# EAGLE board aleph-primary121205 (EAGLE 5.11), part 1 of 2
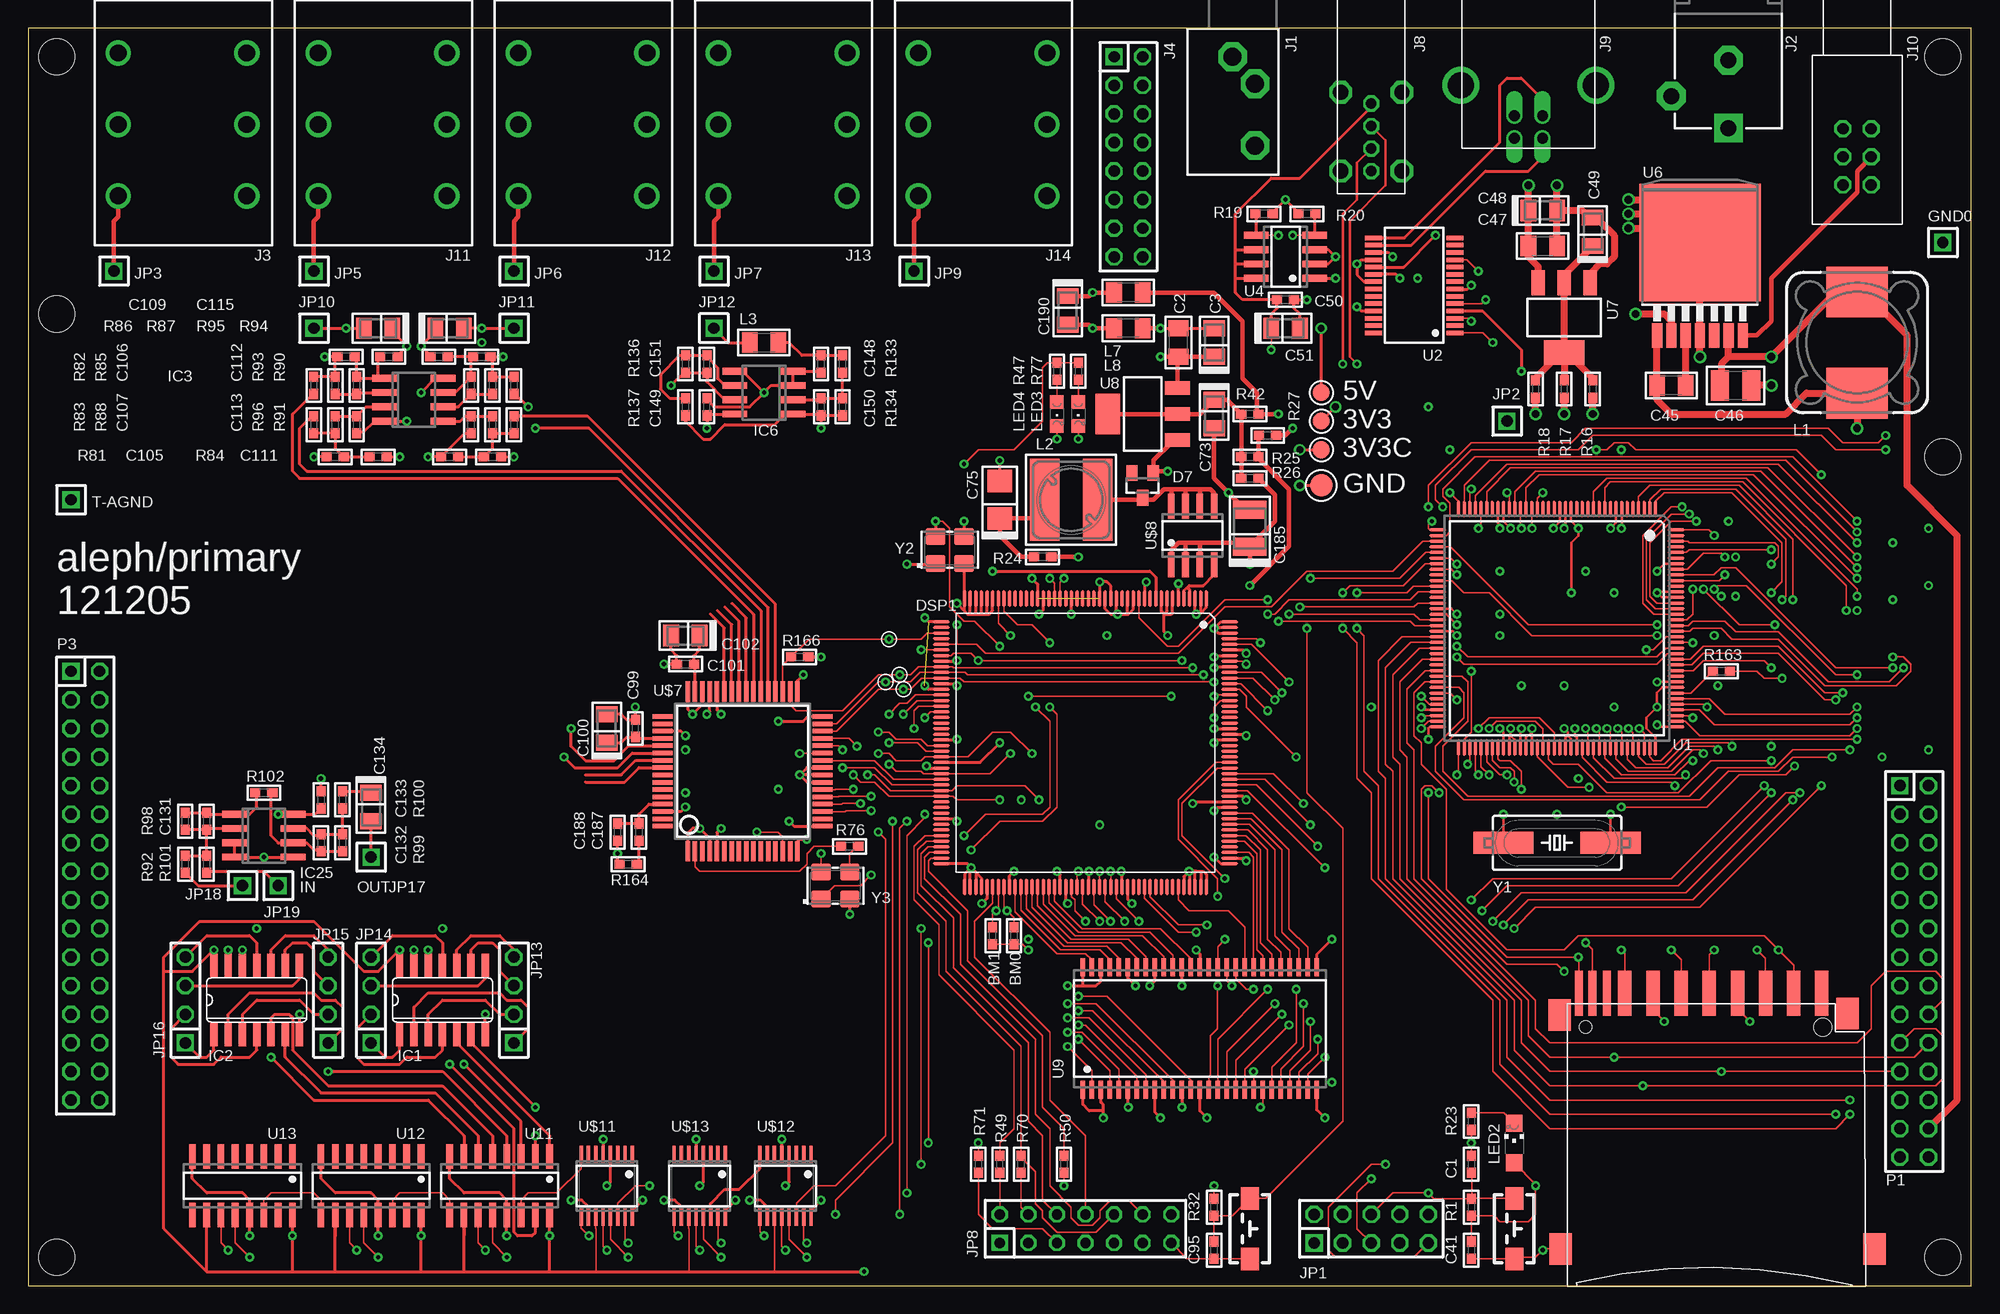
[diagram p0: board, top side]
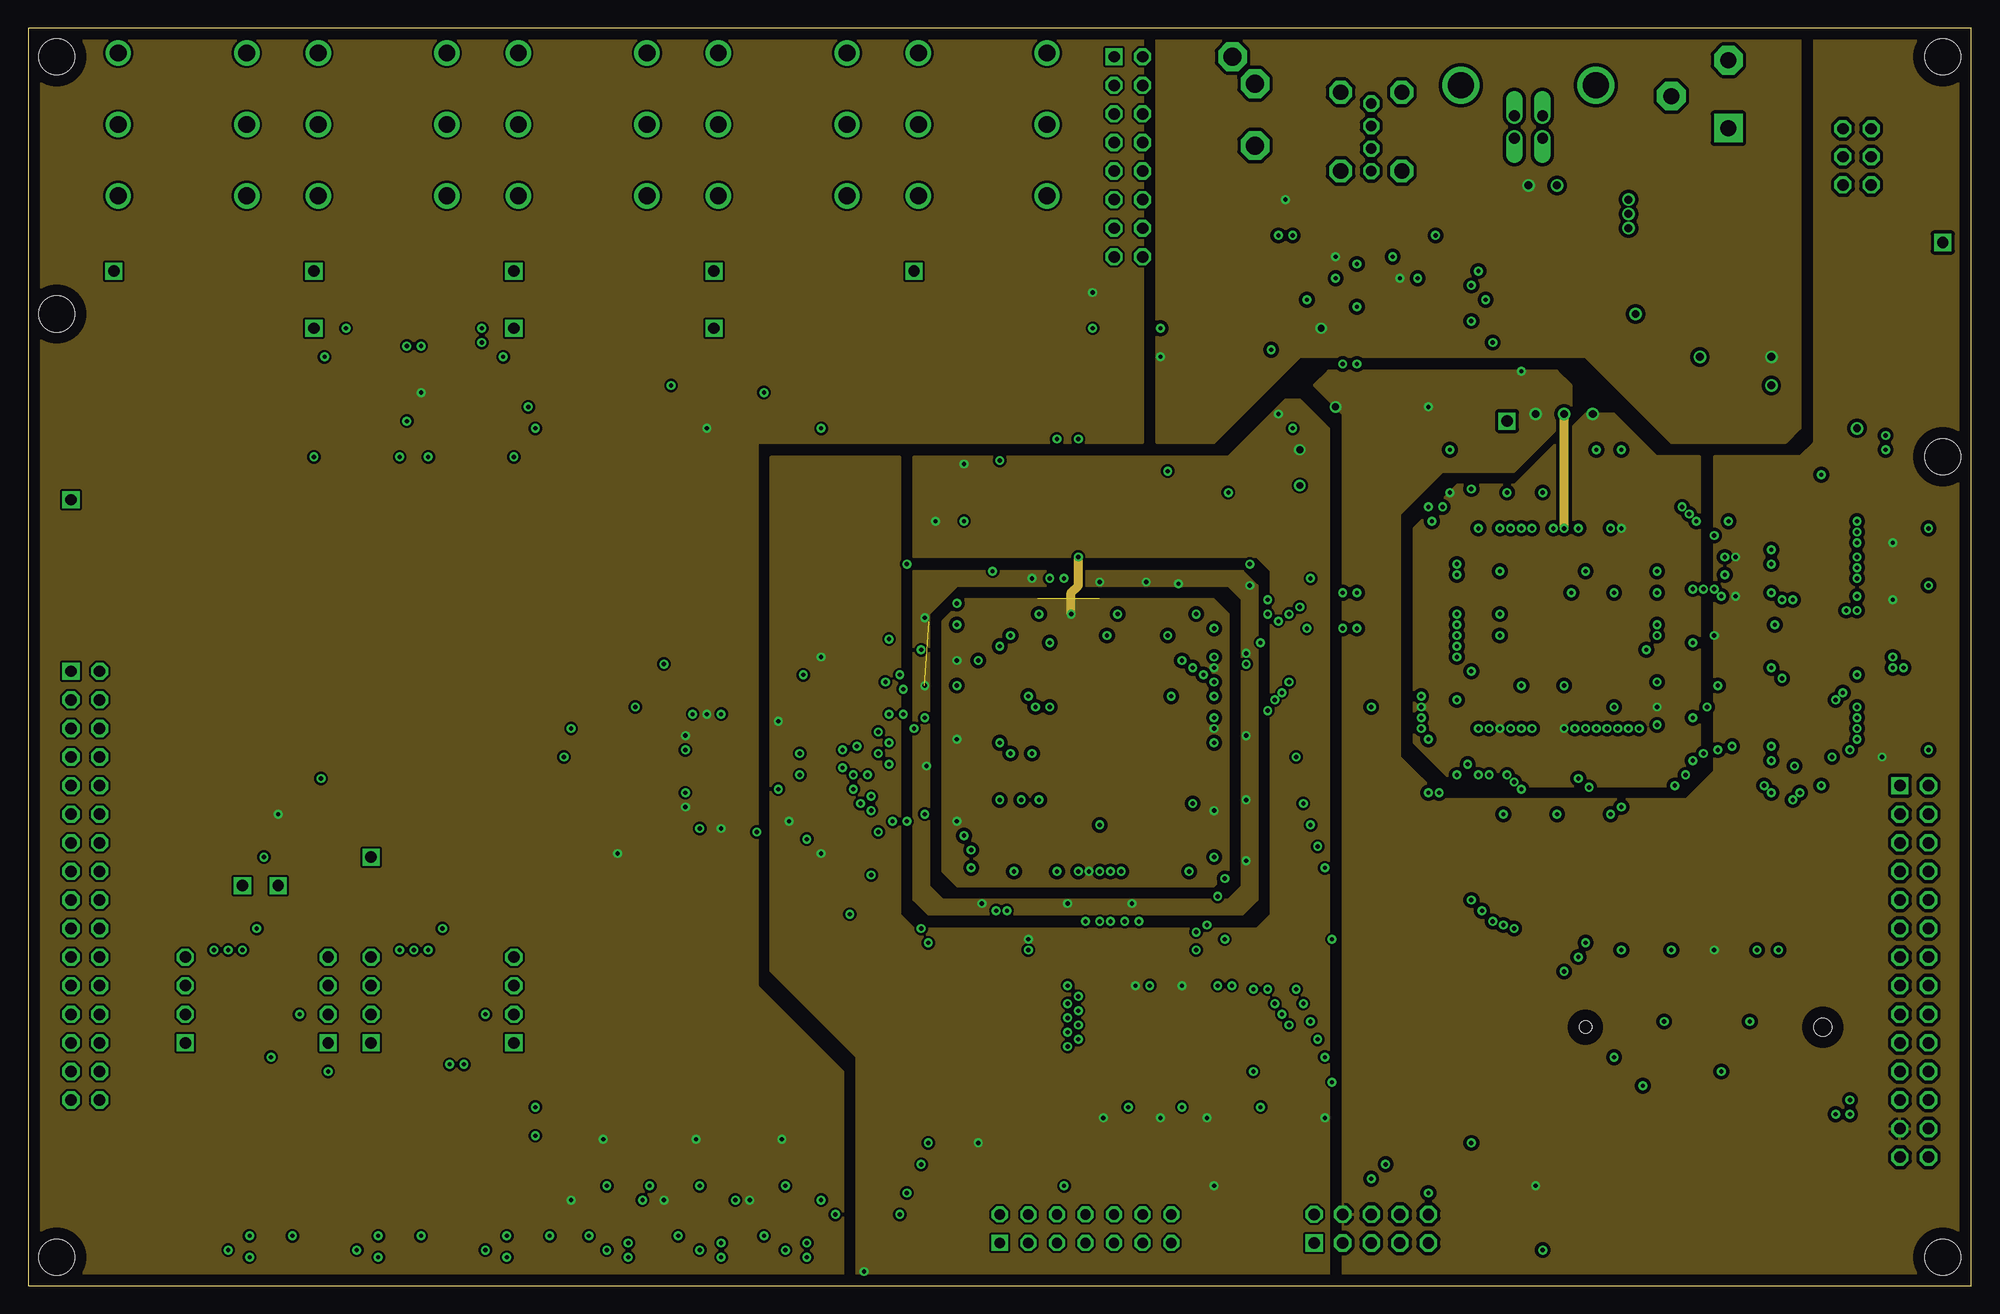
[diagram p1: board, inner layer Route2]
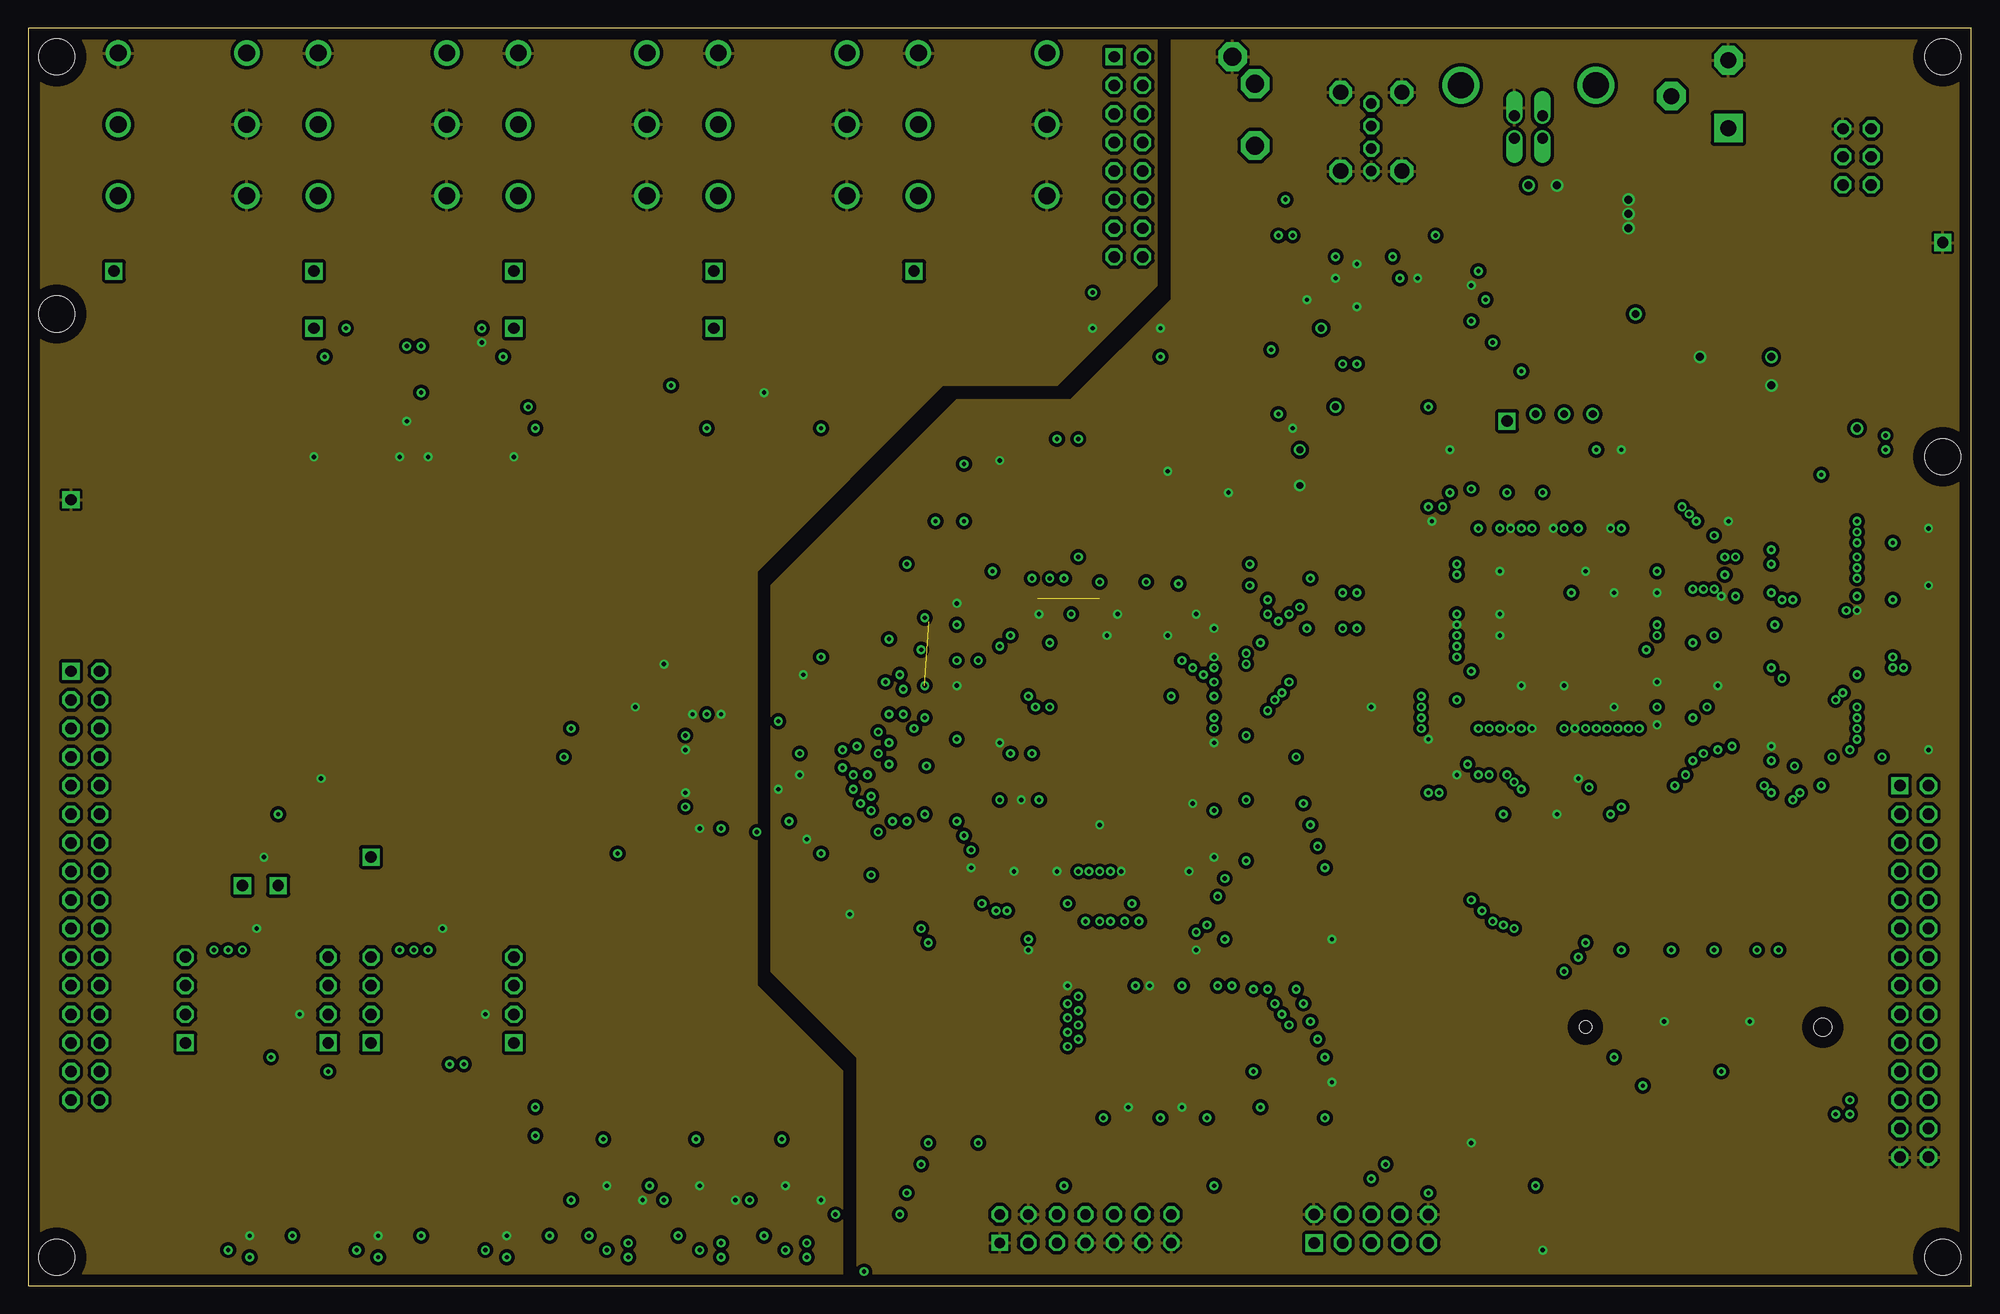
[diagram p2: board, inner layer Route3]
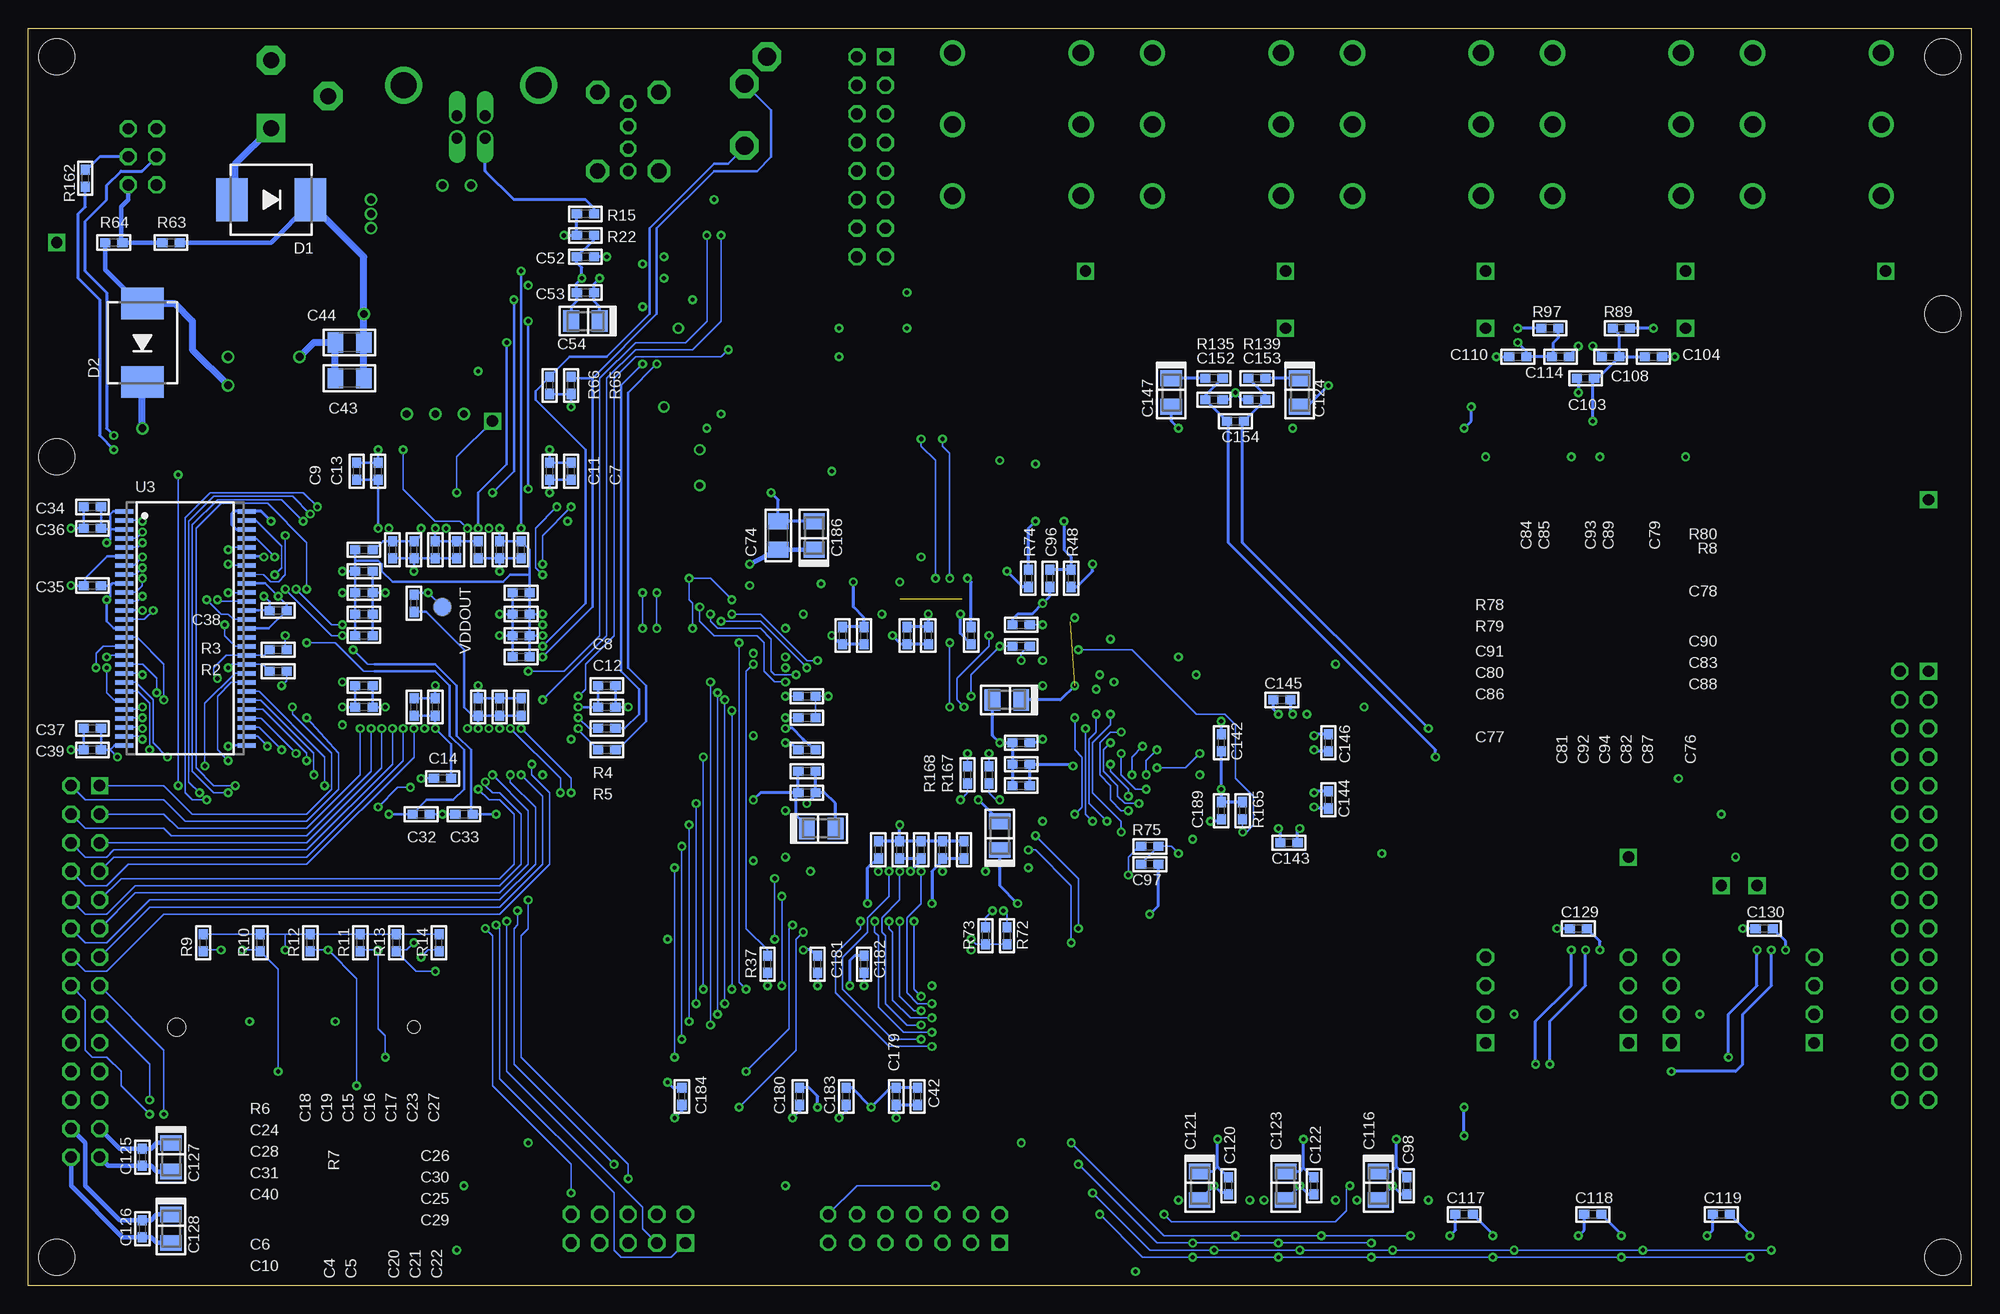
[diagram p3: board, bottom side, seen from below]

Size 172.72 x 111.76 mm. Coordinates in mm from the lower left corner, seen from the top.
Outline: 0,0 172.72,0 172.72,111.76 0,111.76 0,0
Copper layers (1*2+3*16): Top 0.035mm / dielectric 1.5mm / Route2 0.035mm / dielectric 0.15mm / Route3 0.035mm / dielectric 0.2mm / Bottom 0.035mm
Design rules "default *": minimum track width 10mil, minimum drill 24mil, track to track 8mil, track to pad 8mil, pad to pad 8mil, via to via 8mil, smd to smd 8mil, copper to edge 40mil, drill to drill 8mil, minimum pad ring 10mil, minimum via ring 8mil, stop-mask expansion 4mil, vias tented up to drill 0mil, thermal gap 10mil
Holes 3.2 mm at 170.18,109.22 2.54,109.22 2.54,2.54 170.18,2.54 2.54,86.36 170.18,73.66

## Footprints (pad centres in the part's own frame; a part is rotated, then mirrored left to right if it is on the bottom)
SMD-15R = smd 1.5 x 1.5: TP 0,0
R0603 = smd 0.9 x 0.8: 1 -0.762,0; 2 0.762,0
C0603 = smd 0.9 x 0.8: 1 -0.762,0; 2 0.762,0
C1206 = smd 1.4 x 1.8: 1 -1.27,0; 2 1.27,0
C1206/T = smd 1.4 x 1.9: + 1.27,0; - -1.27,0
C3225 = smd 1.6 x 2.7: 1 -1.397,0; 2 1.397,0
C3528/T = smd 2 x 2.2: + 1.651,0; - -1.651,0
C1210/T = smd 1.6 x 3: + 1.651,0; - -1.651,0
SMC = smd 2.8 x 3.8: A 3.493,0; C -3.493,0
SOT23 = smd 1 x 1.4: 1 -0.95,-1.1; 2 0.95,-1.1; 3 0,1.1
LQFP176 = smd 1.5 x 0.25: P$1 -12.8,10.75; P$2 -12.8,10.25; P$3 -12.8,9.75; P$4 -12.8,9.25; P$5 -12.8,8.75; P$6 -12.8,8.25; P$7 -12.8,7.75; P$8 -12.8,7.25; P$9 -12.8,6.75; P$10 -12.8,6.25; P$11 -12.8,5.75; P$12 -12.8,5.25; P$13 -12.8,4.75; P$14 -12.8,4.25; P$15 -12.8,3.75; P$16 -12.8,3.25; P$17 -12.8,2.75; P$18 -12.8,2.25; P$19 -12.8,1.75; P$20 -12.8,1.25; P$21 -12.8,0.75; P$22 -12.8,0.25; P$23 -12.8,-0.25; P$24 -12.8,-0.75; P$25 -12.8,-1.25; P$26 -12.8,-1.75; P$27 -12.8,-2.25; P$28 -12.8,-2.75; P$29 -12.8,-3.25; P$30 -12.8,-3.75; P$31 -12.8,-4.25; P$32 -12.8,-4.75; P$33 -12.8,-5.25; P$34 -12.8,-5.75; P$35 -12.8,-6.25; P$36 -12.8,-6.75; P$37 -12.8,-7.25; P$38 -12.8,-7.75; P$39 -12.8,-8.25; P$40 -12.8,-8.75; P$41 -12.8,-9.25; P$42 -12.8,-9.75; P$43 -12.8,-10.25; P$44 -12.8,-10.75; P$89 12.8,-10.75; P$90 12.8,-10.25; P$91 12.8,-9.75; P$92 12.8,-9.25; P$93 12.8,-8.75; P$94 12.8,-8.25; P$95 12.8,-7.75; P$96 12.8,-7.25; P$97 12.8,-6.75; P$98 12.8,-6.25; P$99 12.8,-5.75; P$100 12.8,-5.25; P$101 12.8,-4.75; P$102 12.8,-4.25; P$103 12.8,-3.75; P$104 12.8,-3.25; P$105 12.8,-2.75; P$106 12.8,-2.25; P$107 12.8,-1.75; P$108 12.8,-1.25; P$109 12.8,-0.75; P$110 12.8,-0.25; P$111 12.8,0.25; P$112 12.8,0.75; P$113 12.8,1.25; P$114 12.8,1.75; P$115 12.8,2.25; P$116 12.8,2.75; P$117 12.8,3.25; P$118 12.8,3.75; P$119 12.8,4.25; P$120 12.8,4.75; P$121 12.8,5.25; P$122 12.8,5.75; P$123 12.8,6.25; P$124 12.8,6.75; P$125 12.8,7.25; P$126 12.8,7.75; P$127 12.8,8.25; P$128 12.8,8.75; P$129 12.8,9.25; P$130 12.8,9.75; P$131 12.8,10.25; P$132 12.8,10.75 | smd 0.25 x 1.5: P$45 -10.75,-12.8; P$46 -10.25,-12.8; P$47 -9.75,-12.8; P$48 -9.25,-12.8; P$49 -8.75,-12.8; P$50 -8.25,-12.8; P$51 -7.75,-12.8; P$52 -7.25,-12.8; P$53 -6.75,-12.8; P$54 -6.25,-12.8; P$55 -5.75,-12.8; P$56 -5.25,-12.8; P$57 -4.75,-12.8; P$58 -4.25,-12.8; P$59 -3.75,-12.8; P$60 -3.25,-12.8; P$61 -2.75,-12.8; P$62 -2.25,-12.8; P$63 -1.75,-12.8; P$64 -1.25,-12.8; P$65 -0.75,-12.8; P$66 -0.25,-12.8; P$67 0.25,-12.8; P$68 0.75,-12.8; P$69 1.25,-12.8; P$70 1.75,-12.8; P$71 2.25,-12.8; P$72 2.75,-12.8; P$73 3.25,-12.8; P$74 3.75,-12.8; P$75 4.25,-12.8; P$76 4.75,-12.8; P$77 5.25,-12.8; P$78 5.75,-12.8; P$79 6.25,-12.8; P$80 6.75,-12.8; P$81 7.25,-12.8; P$82 7.75,-12.8; P$83 8.25,-12.8; P$84 8.75,-12.8; P$85 9.25,-12.8; P$86 9.75,-12.8; P$87 10.25,-12.8; P$88 10.75,-12.8; P$133 10.75,12.8; P$134 10.25,12.8; P$135 9.75,12.8; P$136 9.25,12.8; P$137 8.75,12.8; P$138 8.25,12.8; P$139 7.75,12.8; P$140 7.25,12.8; P$141 6.75,12.8; P$142 6.25,12.8; P$143 5.75,12.8; P$144 5.25,12.8; P$145 4.75,12.8; P$146 4.25,12.8; P$147 3.75,12.8; P$148 3.25,12.8; P$149 2.75,12.8; P$150 2.25,12.8; P$151 1.75,12.8; P$152 1.25,12.8; P$153 0.75,12.8; P$154 0.25,12.8; P$155 -0.25,12.8; P$156 -0.75,12.8; P$157 -1.25,12.8; P$158 -1.75,12.8; P$159 -2.25,12.8; P$160 -2.75,12.8; P$161 -3.25,12.8; P$162 -3.75,12.8; P$163 -4.25,12.8; P$164 -4.75,12.8; P$165 -5.25,12.8; P$166 -5.75,12.8; P$167 -6.25,12.8; P$168 -6.75,12.8; P$169 -7.25,12.8; P$170 -7.75,12.8; P$171 -8.25,12.8; P$172 -8.75,12.8; P$173 -9.25,12.8; P$174 -9.75,12.8; P$175 -10.25,12.8; P$176 -10.75,12.8
SMD-20R = smd 2 x 2: TP 0,0
1X01 = drill 1.016 square: 1 0,0
SO14 = smd 0.66 x 2.032: 1 -3.81,-3.073; 2 -2.54,-3.073; 3 -1.27,-3.073; 4 0,-3.073; 5 1.27,-3.073; 6 2.54,-3.073; 7 3.81,-3.073; 8 3.81,3.073; 9 2.54,3.073; 10 1.27,3.073; 11 0,3.073; 12 -1.27,3.073; 13 -2.54,3.073; 14 -3.81,3.073
SO8 = smd 0.6 x 2.2: 1 -1.905,-2.6; 2 -0.635,-2.6; 3 0.635,-2.6; 4 1.905,-2.6; 5 1.905,2.6; 6 0.635,2.6; 7 -0.635,2.6; 8 -1.905,2.6
SO08 = smd 0.6 x 2.2: 1 -1.905,-2.6; 2 -0.635,-2.6; 3 0.635,-2.6; 4 1.905,-2.6; 5 1.905,2.6; 6 0.635,2.6; 7 -0.635,2.6; 8 -1.905,2.6
SJ1-3533NG = drill 1.6 pad 2.54 octagon: 1 0,-0.9; 2 2.4,1.1; 3 7.9,1.1
PJ-102XH = drill 1.422 pad 2.54 square: 1 0,0 | drill 1.422 pad 2.54 octagon: 2 0,-6.032; 3 5.08,-2.857
NEUTRIK-NRJ6HM-1 = drill 1.5 round: R 7.23,11.1; RN -4.2,11.1; S 7.23,4.75; SN -4.2,4.75; T 7.23,17.45; TN -4.2,17.45
DIL-100-2X08 = drill 1.016 square: 1 -8.89,-1.27 | drill 1.016 octagon: 2 -8.89,1.27; 3 -6.35,-1.27; 4 -6.35,1.27; 5 -3.81,-1.27; 6 -3.81,1.27; 7 -1.27,-1.27; 8 -1.27,1.27; 9 1.27,-1.27; 10 1.27,1.27; 11 3.81,-1.27; 12 3.81,1.27; 13 6.35,-1.27; 14 6.35,1.27; 15 8.89,-1.27; 16 8.89,1.27
USBA-VERT = drill 0.92 octagon: 1 0,-6; 2 0,-4; 3 0,-2; 4 0,0 | drill 1.35 octagon: G1 -2.72,0; G2 -2.72,-7; G3 2.72,-7; G4 2.72,0
USB_B = drill 0.95 offset: DM -1.25,4.71; DP -1.25,2.71; GND 1.25,2.71; VCC 1.25,4.71 | drill 2.3 round: MOUNT1 -6,0; MOUNT2 6,0
PHA2U = drill 1 octagon: 0 -1.25,0; 1 -1.25,-2.5; 2 -1.25,2.5; _0 1.25,0; _1 1.25,-2.5; _2 1.25,2.5
AVR-JTAG-10 = drill 1.016 square: 1 -5.08,-1.27 | drill 1.016 octagon: 2 -5.08,1.27; 3 -2.54,-1.27; 4 -2.54,1.27; 5 0,-1.27; 6 0,1.27; 7 2.54,-1.27; 8 2.54,1.27; 9 5.08,-1.27; 10 5.08,1.27
JPQ-07 = drill 0.914 square: 1 -7.62,-1.27 | drill 0.914 octagon: 2 -7.62,1.27; 3 -5.08,-1.27; 4 -5.08,1.27; 5 -2.54,-1.27; 6 -2.54,1.27; 7 0,-1.27; 8 0,1.27; 9 2.54,-1.27; 10 2.54,1.27; 11 5.08,-1.27; 12 5.08,1.27; 13 7.62,-1.27; 14 7.62,1.27
1X04 = drill 1.016 square: 1 -3.81,0 | drill 1.016 octagon: 2 -1.27,0; 3 1.27,0; 4 3.81,0
MSS1278 = smd 5.5 x 4.5: 1 0,4.5; 2 0,-4.5
SRR6038 = smd 7.3 x 2.6: 1 0,2.35; 2 0,-2.35
L1206 = smd 1.4 x 1.8: 1 -1.27,0; 2 1.27,0
CHIPLED_1206 = smd 1.5 x 1.5: A 0,-1.75; C 0,1.75
CHIPLED_0805 = smd 1.2 x 1.2: A 0,-1.05; C 0,1.05
DIL-100-2X14 = drill 1.016 square: 1 -16.51,-1.27 | drill 1.016 octagon: 2 -16.51,1.27; 3 -13.97,-1.27; 4 -13.97,1.27; 5 -11.43,-1.27; 6 -11.43,1.27; 7 -8.89,-1.27; 8 -8.89,1.27; 9 -6.35,-1.27; 10 -6.35,1.27; 11 -3.81,-1.27; 12 -3.81,1.27; 13 -1.27,-1.27; 14 -1.27,1.27; 15 1.27,-1.27; 16 1.27,1.27; 17 3.81,-1.27; 18 3.81,1.27; 19 6.35,-1.27; 20 6.35,1.27; 21 8.89,-1.27; 22 8.89,1.27; 23 11.43,-1.27; 24 11.43,1.27; 25 13.97,-1.27; 26 13.97,1.27; 27 16.51,-1.27; 28 16.51,1.27
DIL-100-2X16 = drill 1.016 square: 1 -19.05,-1.27 | drill 1.016 octagon: 2 -19.05,1.27; 3 -16.51,-1.27; 4 -16.51,1.27; 5 -13.97,-1.27; 6 -13.97,1.27; 7 -11.43,-1.27; 8 -11.43,1.27; 9 -8.89,-1.27; 10 -8.89,1.27; 11 -6.35,-1.27; 12 -6.35,1.27; 13 -3.81,-1.27; 14 -3.81,1.27; 15 -1.27,-1.27; 16 -1.27,1.27; 17 1.27,-1.27; 18 1.27,1.27; 19 3.81,-1.27; 20 3.81,1.27; 21 6.35,-1.27; 22 6.35,1.27; 23 8.89,-1.27; 24 8.89,1.27; 25 11.43,-1.27; 26 11.43,1.27; 27 13.97,-1.27; 28 13.97,1.27; 29 16.51,-1.27; 30 16.51,1.27; 31 19.05,-1.27; 32 19.05,1.27
LQFP144 = smd 0.25 x 1.5: 1 -8.75,-10.6; 2 -8.25,-10.6; 3 -7.75,-10.6; 4 -7.25,-10.6; 5 -6.75,-10.6; 6 -6.25,-10.6; 7 -5.75,-10.6; 8 -5.25,-10.6; 9 -4.75,-10.6; 10 -4.25,-10.6; 11 -3.75,-10.6; 12 -3.25,-10.6; 13 -2.75,-10.6; 14 -2.25,-10.6; 15 -1.75,-10.6; 16 -1.25,-10.6; 17 -0.75,-10.6; 18 -0.25,-10.6; 19 0.25,-10.6; 20 0.75,-10.6; 21 1.25,-10.6; 22 1.75,-10.6; 23 2.25,-10.6; 24 2.75,-10.6; 25 3.25,-10.6; 26 3.75,-10.6; 27 4.25,-10.6; 28 4.75,-10.6; 29 5.25,-10.6; 30 5.75,-10.6; 31 6.25,-10.6; 32 6.75,-10.6; 33 7.25,-10.6; 34 7.75,-10.6; 35 8.25,-10.6; 36 8.75,-10.6; 73 8.75,10.6; 74 8.25,10.6; 75 7.75,10.6; 76 7.25,10.6; 77 6.75,10.6; 78 6.25,10.6; 79 5.75,10.6; 80 5.25,10.6; 81 4.75,10.6; 82 4.25,10.6; 83 3.75,10.6; 84 3.25,10.6; 85 2.75,10.6; 86 2.25,10.6; 87 1.75,10.6; 88 1.25,10.6; 89 0.75,10.6; 90 0.25,10.6; 91 -0.25,10.6; 92 -0.75,10.6; 93 -1.25,10.6; 94 -1.75,10.6; 95 -2.25,10.6; 96 -2.75,10.6; 97 -3.25,10.6; 98 -3.75,10.6; 99 -4.25,10.6; 100 -4.75,10.6; 101 -5.25,10.6; 102 -5.75,10.6; 103 -6.25,10.6; 104 -6.75,10.6; 105 -7.25,10.6; 106 -7.75,10.6; 107 -8.25,10.6; 108 -8.75,10.6 | smd 1.5 x 0.25: 37 10.6,-8.75; 38 10.6,-8.25; 39 10.6,-7.75; 40 10.6,-7.25; 41 10.6,-6.75; 42 10.6,-6.25; 43 10.6,-5.75; 44 10.6,-5.25; 45 10.6,-4.75; 46 10.6,-4.25; 47 10.6,-3.75; 48 10.6,-3.25; 49 10.6,-2.75; 50 10.6,-2.25; 51 10.6,-1.75; 52 10.6,-1.25; 53 10.6,-0.75; 54 10.6,-0.25; 55 10.6,0.25; 56 10.6,0.75; 57 10.6,1.25; 58 10.6,1.75; 59 10.6,2.25; 60 10.6,2.75; 61 10.6,3.25; 62 10.6,3.75; 63 10.6,4.25; 64 10.6,4.75; 65 10.6,5.25; 66 10.6,5.75; 67 10.6,6.25; 68 10.6,6.75; 69 10.6,7.25; 70 10.6,7.75; 71 10.6,8.25; 72 10.6,8.75; 109 -10.6,8.75; 110 -10.6,8.25; 111 -10.6,7.75; 112 -10.6,7.25; 113 -10.6,6.75; 114 -10.6,6.25; 115 -10.6,5.75; 116 -10.6,5.25; 117 -10.6,4.75; 118 -10.6,4.25; 119 -10.6,3.75; 120 -10.6,3.25; 121 -10.6,2.75; 122 -10.6,2.25; 123 -10.6,1.75; 124 -10.6,1.25; 125 -10.6,0.75; 126 -10.6,0.25; 127 -10.6,-0.25; 128 -10.6,-0.75; 129 -10.6,-1.25; 130 -10.6,-1.75; 131 -10.6,-2.25; 132 -10.6,-2.75; 133 -10.6,-3.25; 134 -10.6,-3.75; 135 -10.6,-4.25; 136 -10.6,-4.75; 137 -10.6,-5.25; 138 -10.6,-5.75; 139 -10.6,-6.25; 140 -10.6,-6.75; 141 -10.6,-7.25; 142 -10.6,-7.75; 143 -10.6,-8.25; 144 -10.6,-8.75
SSOP28 = smd 0.4 x 1.5: 1 -4.225,-3.625; 2 -3.575,-3.625; 3 -2.925,-3.625; 4 -2.275,-3.625; 5 -1.625,-3.625; 6 -0.975,-3.625; 7 -0.325,-3.625; 8 0.325,-3.625; 9 0.975,-3.625; 10 1.625,-3.625; 11 2.275,-3.625; 12 2.925,-3.625; 13 3.575,-3.625; 14 4.225,-3.625; 15 4.225,3.625; 16 3.575,3.625; 17 2.925,3.625; 18 2.275,3.625; 19 1.625,3.625; 20 0.975,3.625; 21 0.325,3.625; 22 -0.325,3.625; 23 -0.975,3.625; 24 -1.625,3.625; 25 -2.275,3.625; 26 -2.925,3.625; 27 -3.575,3.625; 28 -4.225,3.625
TSOP54 = smd 0.4 x 1.6: 1 -10.4,-5.45; 2 -9.6,-5.45; 3 -8.8,-5.45; 4 -8,-5.45; 5 -7.2,-5.45; 6 -6.4,-5.45; 7 -5.6,-5.45; 8 -4.8,-5.45; 9 -4,-5.45; 10 -3.2,-5.45; 11 -2.4,-5.45; 12 -1.6,-5.45; 13 -0.8,-5.45; 14 0,-5.45; 15 0.8,-5.45; 16 1.6,-5.45; 17 2.4,-5.45; 18 3.2,-5.45; 19 4,-5.45; 20 4.8,-5.45; 21 5.6,-5.45; 22 6.4,-5.45; 23 7.2,-5.45; 24 8,-5.45; 25 8.8,-5.45; 26 9.6,-5.45; 27 10.4,-5.45; 28 10.4,5.45; 29 9.6,5.45; 30 8.8,5.45; 31 8,5.45; 32 7.2,5.45; 33 6.4,5.45; 34 5.6,5.45; 35 4.8,5.45; 36 4,5.45; 37 3.2,5.45; 38 2.4,5.45; 39 1.6,5.45; 40 0.8,5.45; 41 0,5.45; 42 -0.8,5.45; 43 -1.6,5.45; 44 -2.4,5.45; 45 -3.2,5.45; 46 -4,5.45; 47 -4.8,5.45; 48 -5.6,5.45; 49 -6.4,5.45; 50 -7.2,5.45; 51 -8,5.45; 52 -8.8,5.45; 53 -9.6,5.45; 54 -10.4,5.45
TO263-7 = smd 0.914 x 2.159: 1 -3.81,-5.715; 2 -2.54,-5.715; 3 -1.27,-5.715; 4 0,-5.715; 5 1.27,-5.715; 6 2.54,-5.715; 7 3.81,-5.715 | smd 10.8 x 10.41: 8 0,2.54
SOT223 = smd 1.219 x 2.235: 1 -2.311,-3.099; 2 0,-3.099; 3 2.311,-3.099 | smd 3.6 x 2.2: 4 0,3.099
SO16 = smd 0.6 x 2.2: 1 -4.445,-2.6; 2 -3.175,-2.6; 3 -1.905,-2.6; 4 -0.635,-2.6; 5 0.635,-2.6; 6 1.905,-2.6; 7 3.175,-2.6; 8 4.445,-2.6; 9 4.445,2.6; 10 3.175,2.6; 11 1.905,2.6; 12 0.635,2.6; 13 -0.635,2.6; 14 -1.905,2.6; 15 -3.175,2.6; 16 -4.445,2.6
PANASONIC-EVQ = smd 2 x 1.6: 1 2.7,0; 2 -2.7,0
06132 = smd 1.2 x 4: 1 6.9,0.9; 2 4.4,0.9; 3 1.9,0.9; 4 -0.6,0.9; 5 -3.1,0.9; 6 -5.6,0.9; 7 -8.1,0.9; 9 9.4,0.9 | smd 0.7 x 4: 8 -9.7,0.9; CD -11,0.9; WP -12.2,0.9 | smd 2 x 2.8: GP -13.8,-21.8; GP2 14.1,-21.8; GP3 11.7,-0.9; GP4 -13.9,-1 | hole 1.1: -11.6,-2.1 | hole 1.6: 9.5,-2.1
SQFP-S-12X12-64 = smd 0.4 x 1.8: 1 -4.875,-7.1; 2 -4.225,-7.1; 3 -3.575,-7.1; 4 -2.925,-7.1; 5 -2.275,-7.1; 6 -1.625,-7.1; 7 -0.975,-7.1; 8 -0.325,-7.1; 9 0.325,-7.1; 10 0.975,-7.1; 11 1.625,-7.1; 12 2.275,-7.1; 13 2.925,-7.1; 14 3.575,-7.1; 15 4.225,-7.1; 16 4.875,-7.1; 33 4.875,7.1; 34 4.225,7.1; 35 3.575,7.1; 36 2.925,7.1; 37 2.275,7.1; 38 1.625,7.1; 39 0.975,7.1; 40 0.325,7.1; 41 -0.325,7.1; 42 -0.975,7.1; 43 -1.625,7.1; 44 -2.275,7.1; 45 -2.925,7.1; 46 -3.575,7.1; 47 -4.225,7.1; 48 -4.875,7.1 | smd 1.8 x 0.4: 17 7.1,-4.875; 18 7.1,-4.225; 19 7.1,-3.575; 20 7.1,-2.925; 21 7.1,-2.275; 22 7.1,-1.625; 23 7.1,-0.975; 24 7.1,-0.325; 25 7.1,0.325; 26 7.1,0.975; 27 7.1,1.625; 28 7.1,2.275; 29 7.1,2.925; 30 7.1,3.575; 31 7.1,4.225; 32 7.1,4.875; 49 -7.1,4.875; 50 -7.1,4.225; 51 -7.1,3.575; 52 -7.1,2.925; 53 -7.1,2.275; 54 -7.1,1.625; 55 -7.1,0.975; 56 -7.1,0.325; 57 -7.1,-0.325; 58 -7.1,-0.975; 59 -7.1,-1.625; 60 -7.1,-2.275; 61 -7.1,-2.925; 62 -7.1,-3.575; 63 -7.1,-4.225; 64 -7.1,-4.875
TSSOP16 = smd 0.3 x 1.5: 1 -2.275,-2.8; 2 -1.625,-2.8; 3 -0.975,-2.8; 4 -0.325,-2.8; 5 0.325,-2.8; 6 0.975,-2.8; 7 1.625,-2.8; 8 2.275,-2.8; 9 2.275,2.8; 10 1.625,2.8; 11 0.975,2.8; 12 0.325,2.8; 13 -0.325,2.8; 14 -0.975,2.8; 15 -1.625,2.8; 16 -2.275,2.8
SMD-15RN = smd 1.5 x 1.5: TP 0,0
HC49UP = smd 5.334 x 1.93: 1 -4.763,0; 2 4.763,0
ASFL1 = smd 1.7 x 1.5: 1 -1.27,-1.2; 2 1.27,-1.2; 3 1.27,1.2; 4 -1.27,1.2

## Placement (x,y rotation side)
3V3  TPS-SMD-15R  [SMD-15R]  114.94,76.83 0 top
3V3C  TPS-SMD-15R  [SMD-15R]  114.94,74.3 0 top
5V  TPS-SMD-15R  [SMD-15R]  114.94,79.38 0 top
BM0  0  [R0603]  87.63,31.11 90 top
BM1  DNP  [R0603]  85.72,31.11 90 top
C1  100n  [C0603]  128.27,10.79 90 top
C2  100n  [C1206]  102.23,83.82 270 top
C3  10u  [C1206/T]  105.41,83.82 270 top
C4  100n  [C0603]  138.43,51.44 90 bottom
C5  33n  [C0603]  136.53,51.44 90 bottom
C6  100n  [C0603]  142.88,53.34 0 bottom
C7  100n  [C0603]  124.46,72.39 90 bottom
C8  100n  [C0603]  121.28,53.34 0 bottom
C9  100n  [C0603]  143.51,72.39 90 bottom
C10  33n  [C0603]  142.88,51.44 0 bottom
C11  33n  [C0603]  126.36,72.39 90 bottom
C12  33n  [C0603]  121.28,51.44 0 bottom
C13  33n  [C0603]  141.6,72.39 90 bottom
C14  4.7u  [C0603]  135.89,45.09 180 bottom
C15  33n  [C0603]  136.53,65.41 270 bottom
C16  100n  [C0603]  134.62,65.41 270 bottom
C17  4.7u  [C0603]  132.72,65.41 270 bottom
C18  2.2u  [C0603]  140.34,65.41 270 bottom
C19  470p  [C0603]  138.43,65.41 270 bottom
C20  2.7n  [C0603]  132.72,51.44 90 bottom
C21  33n  [C0603]  130.81,51.44 90 bottom
C22  2.2u  [C0603]  128.91,51.44 90 bottom
C23  2.7n  [C0603]  130.81,65.41 270 bottom
C24  2.7n  [C0603]  142.88,63.5 0 bottom
C25  2.7n  [C0603]  128.91,57.78 180 bottom
C26  2.7n  [C0603]  128.91,61.59 180 bottom
C27  33n  [C0603]  128.91,65.41 270 bottom
C28  33n  [C0603]  142.88,61.59 0 bottom
C29  33n  [C0603]  128.91,55.88 180 bottom
C30  33n  [C0603]  128.91,59.69 180 bottom
C31  100n  [C0603]  142.88,59.69 0 bottom
C32  22p  [C0603]  137.79,41.91 0 bottom
C33  22p  [C0603]  133.99,41.91 180 bottom
C34  4.7u  [C0603]  167,69.22 180 bottom
C35  100n  [C0603]  167,62.23 180 bottom
C36  33n  [C0603]  167,67.31 180 bottom
C37  100n  [C0603]  167,49.53 180 bottom
C38  33n  [C0603]  150.5,60.01 0 bottom
C39  4.7u  [C0603]  167,47.62 180 bottom
C40  2.2u  [C0603]  142.88,57.78 0 bottom
C41  100n  [C0603]  128.27,3.17 270 top
C42  10n  [C0603]  93.66,16.83 270 bottom
C43  22u  [C1206]  144.15,80.64 0 bottom
C44  470n  [C1206]  144.15,83.82 0 bottom
C45  10n  [C1206]  146.05,80.01 0 top
C46  47u  [C3225]  151.76,80.01 0 top
C47  100n  [C1206]  134.62,92.39 180 top
C48  10u  [C1206/T]  134.62,95.57 180 top
C49  10u  [C1206/T]  139.06,93.66 270 top
C50  100n  [C0603]  111.76,87.63 180 top
C51  4.7u  [C1206/T]  111.76,85.09 180 top
C52  100n  [C0603]  123.19,91.44 0 bottom
C53  100n  [C0603]  123.19,88.27 0 bottom
C54  4.7u  [C1206/T]  123.19,85.72 0 bottom
C73  10u  [C1206/T]  105.41,77.47 90 top
C74  100n  [C1206]  106.05,66.67 270 bottom
C75  100u  [C3528/T]  86.36,69.85 270 top
C76  10u  [C1206/T]  86.36,40.01 270 bottom
C77  10u  [C1206/T]  102.23,40.64 180 bottom
C78  10u  [C1206/T]  85.72,52.07 0 bottom
C79  100n  [C0603]  88.9,57.78 90 bottom
C80  100n  [C0603]  103.5,45.72 180 bottom
C81  100n  [C0603]  97.16,38.73 270 bottom
C82  100n  [C0603]  91.44,38.73 270 bottom
C83  100n  [C0603]  84.45,46.35 0 bottom
C84  100n  [C0603]  100.33,57.78 90 bottom
C85  10n  [C0603]  98.42,57.78 90 bottom
C86  10n  [C0603]  103.5,43.81 180 bottom
C87  10n  [C0603]  89.53,38.73 270 bottom
C88  10n  [C0603]  84.45,44.45 0 bottom
C89  100n  [C0603]  92.71,57.78 90 bottom
C90  100n  [C0603]  84.45,48.26 0 bottom
C91  100n  [C0603]  103.5,47.62 0 bottom
C92  100n  [C0603]  95.25,38.73 270 bottom
C93  10n  [C0603]  94.61,57.78 90 bottom
C94  10n  [C0603]  93.34,38.73 270 bottom
C95  100n  [C0603]  105.41,3.17 270 top
C96  10n  [C0603]  81.92,62.87 270 bottom
C97  10n  [C0603]  73.03,37.47 0 bottom
C98  100n  [C0603]  50.16,8.89 270 bottom
C99  100n  [C0603]  53.98,49.53 270 top
C100  47u  [C1206/T]  51.44,49.53 270 top
C101  100n  [C0603]  58.42,55.24 0 top
C102  10u  [C1206/T]  58.42,57.78 0 top
C103  100n  [C0603]  34.29,80.64 180 bottom
C104  270p  [C0603]  28.26,82.55 0 bottom
C105  560p  [C0603]  31.11,73.66 0 top
C106  68p  [C0603]  29.21,80.01 90 top
C107  220p  [C0603]  29.21,76.52 90 top
C108  2200p  [C0603]  32.07,82.55 180 bottom
C109  10u  [C1206/T]  31.11,85.09 0 top
C110  270p  [C0603]  40.32,82.55 180 bottom
C111  560p  [C0603]  41.27,73.66 0 top
C112  68p  [C0603]  39.37,80.01 90 top
C113  220p  [C0603]  39.37,76.52 90 top
C114  2200p  [C0603]  36.51,82.55 0 bottom
C115  10u  [C1206/T]  37.47,85.09 180 top
C116  10u  [C1206/T]  52.7,8.89 90 bottom
C117  100n  [C0603]  45.09,6.35 0 bottom
C118  100n  [C0603]  33.66,6.35 0 bottom
C119  100n  [C0603]  22.23,6.35 0 bottom
C120  100n  [C0603]  66.04,8.89 270 bottom
C121  10u  [C1206/T]  68.58,8.89 90 bottom
C122  100n  [C0603]  58.42,8.89 270 bottom
C123  10u  [C1206/T]  60.96,8.89 90 bottom
C124  4.7u  [C1206/T]  59.69,79.38 90 bottom
C125  100n  [C0603]  162.56,11.43 90 bottom
C126  100n  [C0603]  162.56,5.08 90 bottom
C127  10u  [C1206/T]  160.02,11.43 90 bottom
C128  10u  [C1206/T]  160.02,5.08 90 bottom
C129  100n  [C0603]  34.92,31.75 180 bottom
C130  100n  [C0603]  18.41,31.75 180 bottom
C131  27p  [C0603]  15.88,41.27 90 top
C132  47p  [C0603]  26.04,39.37 90 top
C133  100n  [C0603]  26.04,43.18 90 top
C134  10u  [C1206/T]  30.48,42.55 90 top
C142  100n  [C0603]  66.67,48.26 270 bottom
C143  100n  [C0603]  60.64,39.37 0 bottom
C144  100n  [C0603]  57.15,43.18 90 bottom
C145  100n  [C0603]  61.28,52.07 180 bottom
C146  100n  [C0603]  57.15,48.26 270 bottom
C147  4.7u  [C1206/T]  71.12,79.38 90 bottom
C148  100p  [C0603]  70.48,81.92 90 top
C149  100n  [C0603]  60.33,78.11 270 top
C150  120p  [C0603]  70.48,78.11 90 top
C151  120p  [C0603]  60.33,81.92 90 top
C152  1n  [C0603]  67.31,78.74 0 bottom
C153  1n  [C0603]  63.5,78.74 0 bottom
C154  100p  [C0603]  65.41,76.83 0 bottom
C179  10n  [C0603]  95.57,16.83 270 bottom
C180  10n  [C0603]  104.14,16.83 270 bottom
C181  10n  [C0603]  102.55,28.57 270 bottom
C182  10n  [C0603]  98.42,28.57 270 bottom
C183  10n  [C0603]  100.01,16.83 270 bottom
C184  10n  [C0603]  114.62,16.83 270 bottom
C185  100u  [C1210/T]  108.58,67.31 270 top
C186  10u  [C1206/T]  102.87,66.67 270 bottom
C187  5600p  [C0603]  54.29,40.32 90 top
C188  390p  [C0603]  52.39,40.32 90 top
C189  100n  [C0603]  66.67,42.23 90 bottom
C190  10u  [C1206/T]  92.39,86.68 90 top
D1  MBRS360T3  [SMC]  151.13,96.52 180 bottom
D2  MBRS360T3  [SMC]  162.56,83.82 90 bottom
D7  zhcs1000  [SOT23]  99.06,71.12 180 top
DSP1  BF533  [LQFP176]  93.98,48.26 270 top
GND  TPS-SMD-20R  [SMD-20R]  114.94,71.12 0 top
GND0  [1X01]  170.18,92.71 0 top
IC1  4066D  [SO14]  36.83,25.4 0 top
IC2  4066D  [SO14]  20.32,25.4 0 top
IC3  AD8606  [SO8]  34.29,78.74 270 top
IC6  AD8606  [SO8]  65.41,79.38 90 top
IC25  TL072D  [SO08]  20.95,40.01 270 top
J1  SJ1-3533NG  [SJ1-3533NG]  107.95,109.22 270 top
J2  PJ-102AH/BH  [PJ-102XH]  151.13,102.87 180 top
J3  STEREOSW2GND  [NEUTRIK-NRJ6HM-1]  15.24,114.3 180 top
J4  F-2X08-DIL-100  [DIL-100-2X08]  97.79,100.33 270 top
J8  USBA-VERT  [USBA-VERT]  119.38,99.06 180 top
J9  [USB_B]  133.35,106.68 180 top
J10  PHA2U  [PHA2U]  162.56,100.33 180 top
J11  STEREOSW2GND  [NEUTRIK-NRJ6HM-1]  33.02,114.3 180 top
J12  STEREOSW2GND  [NEUTRIK-NRJ6HM-1]  50.8,114.3 180 top
J13  STEREOSW2GND  [NEUTRIK-NRJ6HM-1]  68.58,114.3 180 top
J14  STEREOSW2GND  [NEUTRIK-NRJ6HM-1]  86.36,114.3 180 top
JP1  AVR-JTAG  [AVR-JTAG-10]  119.38,5.08 0 top
JP2  [1X01]  131.44,76.83 0 top
JP3  [1X01]  7.62,90.17 0 top
JP5  [1X01]  25.4,90.17 0 top
JP6  [1X01]  43.18,90.17 0 top
JP7  [1X01]  60.96,90.17 0 top
JP8  JPQ-07-100  [JPQ-07]  93.98,5.08 0 top
JP9  [1X01]  78.74,90.17 0 top
JP10  [1X01]  25.4,85.09 0 top
JP11  [1X01]  43.18,85.09 0 top
JP12  [1X01]  60.96,85.09 270 top
JP13  [1X04]  43.18,25.4 90 top
JP14  [1X04]  30.48,25.4 90 top
JP15  [1X04]  26.67,25.4 90 top
JP16  [1X04]  13.97,25.4 90 top
JP17  [1X01]  30.48,38.1 0 top
JP18  [1X01]  19.05,35.56 0 top
JP19  [1X01]  22.23,35.56 0 top
L1  MSS1278  [MSS1278]  162.56,83.82 180 top
L2  SRR6038-100Y  [SRR6038]  92.71,69.85 270 top
L3  600  [L1206]  65.41,83.82 180 top
L7  600  [L1206]  97.79,88.27 0 top
L8  600  [L1206]  97.79,85.09 0 top
LED2  [CHIPLED_1206]  132.08,12.7 0 top
LED3  [CHIPLED_0805]  93.34,77.47 180 top
LED4  [CHIPLED_0805]  91.44,77.47 180 top
P1  M-2X14-DIL-100  [DIL-100-2X14]  167.64,27.94 270 top
P3  M-2X16-DIL-100  [DIL-100-2X16]  5.08,35.56 270 top
R1  10k  [R0603]  128.27,6.99 270 top
R2  4.7k  [R0603]  150.5,54.61 0 bottom
R3  4.7k  [R0603]  150.5,56.52 0 bottom
R4  39  [R0603]  121.28,49.53 0 bottom
R5  39  [R0603]  121.28,47.62 0 bottom
R6  0  [R0603]  142.88,65.41 180 bottom
R7  0  [R0603]  138.43,60.64 270 bottom
R8  100k  [R0603]  84.45,56.83 180 bottom
R9  100k  [R0603]  157.16,30.48 90 bottom
R10  100k  [R0603]  152.08,30.48 90 bottom
R11  100k  [R0603]  143.19,30.48 90 bottom
R12  100k  [R0603]  147.64,30.48 90 bottom
R13  100k  [R0603]  140.02,30.48 90 bottom
R14  100k  [R0603]  136.21,30.48 90 bottom
R15  4.7k  [R0603]  123.19,95.25 0 bottom
R16  0  [R0603]  139.06,79.69 90 top
R17  0  [R0603]  136.53,79.69 90 top
R18  0  [R0603]  133.99,79.69 90 top
R19  47k  [R0603]  109.86,95.25 0 top
R20  47k  [R0603]  113.67,95.25 180 top
R22  10k  [R0603]  123.19,93.34 0 bottom
R23  150  [R0603]  128.27,14.61 90 top
R24  0  [R0603]  90.17,64.77 180 top
R25  0  [R0603]  108.58,73.66 180 top
R26  0  [R0603]  108.58,71.75 180 top
R27  3.32k  [R0603]  110.17,75.56 0 top
R32  10k  [R0603]  105.41,6.99 90 top
R37  22  [R0603]  107,28.57 90 bottom
R42  0  [R0603]  108.58,77.47 180 top
R47  150  [R0603]  91.44,81.28 90 top
R48  10k  [R0603]  80.01,62.87 90 bottom
R49  0  [R0603]  86.36,10.79 270 top
R50  0  [R0603]  92.08,10.79 270 top
R63  330k  [R0603]  160.02,92.71 0 bottom
R64  100k  [R0603]  165.1,92.71 180 bottom
R65  10k  [R0603]  124.46,80.01 90 bottom
R66  10k  [R0603]  126.36,80.01 90 bottom
R70  4k7  [R0603]  88.27,10.79 270 top
R71  4k7  [R0603]  84.45,10.79 270 top
R72  10k  [R0603]  85.72,31.11 270 bottom
R73  10k  [R0603]  87.63,31.11 270 bottom
R74  33  [R0603]  83.82,62.87 90 bottom
R75  10k  [R0603]  73.03,39.05 0 bottom
R76  33  [R0603]  73.03,39.05 0 top
R77  150  [R0603]  93.34,81.28 90 top
R78  10k  [R0603]  103.5,52.39 0 bottom
R79  10k  [R0603]  103.5,50.48 0 bottom
R80  10k  [R0603]  84.45,58.74 0 bottom
R81  5K62  [R0603]  27.3,73.66 180 top
R82  11k  [R0603]  25.4,80.01 270 top
R83  5K62  [R0603]  25.4,76.52 90 top
R84  5K62  [R0603]  37.47,73.66 180 top
R85  3K01  [R0603]  27.3,80.01 90 top
R86  11k  [R0603]  28.26,82.55 180 top
R87  604  [R0603]  32.07,82.55 0 top
R88  1K5  [R0603]  27.3,76.52 90 top
R89  49k9  [R0603]  31.11,85.09 180 bottom
R90  11k  [R0603]  43.18,80.01 270 top
R91  5K62  [R0603]  43.18,76.52 90 top
R92  10k  [R0603]  13.97,37.47 270 top
R93  3k01  [R0603]  41.27,80.01 90 top
R94  11k  [R0603]  40.32,82.55 0 top
R95  604  [R0603]  36.51,82.55 180 top
R96  1k65  [R0603]  41.27,76.52 90 top
R97  49k9  [R0603]  37.47,85.09 0 bottom
R98  10k  [R0603]  13.97,41.27 270 top
R99  10k  [R0603]  27.94,39.37 270 top
R100  100  [R0603]  27.94,43.18 270 top
R101  10k  [R0603]  15.88,37.47 270 top
R102  10k  [R0603]  20.95,43.81 180 top
R133  5k76  [R0603]  72.39,81.92 90 top
R134  5k76  [R0603]  72.39,78.11 90 top
R135  237  [R0603]  67.31,80.64 180 bottom
R136  5k76  [R0603]  58.42,81.92 90 top
R137  5k76  [R0603]  58.42,78.11 270 top
R139  237  [R0603]  63.5,80.64 0 bottom
R162  100k  [R0603]  167.64,98.42 270 bottom
R163  22  [R0603]  150.5,54.61 180 top
R164  562  [R0603]  53.34,37.47 180 top
R165  10k  [R0603]  64.77,42.23 90 bottom
R166  100k  [R0603]  68.58,55.88 180 top
R167  0  [R0603]  87.31,45.4 90 bottom
R168  0  [R0603]  89.22,45.4 90 bottom
T-AGND  [1X01]  3.81,69.85 0 top
U1  AT32UC3A0512  [LQFP144]  135.89,58.42 180 top
U2  FT232RL  [SSOP28]  123.19,88.9 90 top
U3  MT48LC16M16A2  [TSOP54]  158.75,58.42 270 bottom
U4  TPS2020  [SO08]  111.76,91.44 90 top
U6  LM2678  [TO263-7]  148.59,90.17 0 top
U7  ADP3339  [SOT223]  136.53,86.04 180 top
U8  ADP3339  [SOT223]  99.06,77.47 90 top
U9  MT48LC32M16A2tg-75  [TSOP54]  104.14,22.86 0 top
U11  74LS595D  [SO16]  41.91,8.89 180 top
U12  74LS595D  [SO16]  30.48,8.89 180 top
U13  74LS595D  [SO16]  19.05,8.89 180 top
U$1  PANASONIC-EVQ  [PANASONIC-EVQ]  132.08,5.08 270 top
U$6  SDMMC06132  [06132]  150.02,25.08 0 top
U$7  AD1939  [SQFP-S-12X12-64]  63.5,45.72 0 top
U$8  FDS9431A  [SO08]  103.5,66.67 0 top
U$9  PANASONIC-EVQ  [PANASONIC-EVQ]  108.58,5.08 270 top
U$11  AD5317R  [TSSOP16]  51.44,8.89 180 top
U$12  AD5686R  [TSSOP16]  67.31,8.89 180 top
U$13  AD5317R  [TSSOP16]  59.69,8.89 180 top
VDDOUT  TPS-SMD-15RN  [SMD-15RN]  135.89,60.33 180 bottom
Y1  12mhz  [HC49UP]  135.89,39.37 0 top
Y2  ASFL1-27mhz  [ASFL1]  81.92,65.41 0 top
Y3  ASFL1-12.288mhz  [ASFL1]  71.75,35.56 0 top

## Library data of the parts
3V3 3V3C 5V GND VDDOUT = testpoint
BM0 BM1 C1-C54 C73-C134 C142-C154 C179-C190 L3 L7 L8 R1-R20 R22-R27 R32 R37 R42 R47-R50 R63-R66 R70-R102 R133-R137 R139 R162-R168 = rc-master-smd
D1 D2 D7 = diode
DSP1 J1 J8-J10 U3 U4 U6-U9 U$1 U$6-U$9 U$11-U$13 = monome-inc
GND0 JP2 JP3 JP5-JP7 JP9-JP19 T-AGND = pinhead
IC1 IC2 = 40xx
IC3 IC6 = analog-devices; MPN: AD8607ARMZ-R2; OC_FARNELL: 1651293; OC_NEWARK: 19M8927
IC25 = linear
J2 = con-cuistack
J3 J11-J14 = Audio Jacks 0.25 inch
J4 P1 P3 = con-headers-jp
JP1 U1 = atmel-avr32
JP8 = jumpers
L1 = inductor-coilcraft
L2 = inductor-bourns
LED2-LED4 = led
U2 = ftdi-chip
U11-U13 = 74xx-us
Y1-Y3 = crystal

## Nets
+3V3: 3V3.TP C34.1 C35.1 C36.1 C37.1 C38.1 C39.1 C41.1 C125.2 C127.+ JP1.4 LED2.A P1.25 R1.2 R3.2 R9.2 R10.2 R11.2 R12.2 R13.2 R14.2 R18.1 R65.1 R66.1 U2.4 U3.1 U3.3 U3.9 U3.14 U3.27 U3.43 U3.49 U$6.4
+3V3A: C98.1 C103.2 C116.+ C120.1 C121.+ C122.1 C123.+ C133.1 C143.1 C144.1 C145.1 C146.1 C149.2 C188.1 C190.+ IC3.8 IC6.8 IC25.8 L7.1 R164.2 U$7.5 U$7.45 U$7.51 U$7.62 U$11.5 U$11.10 U$12.5 U$12.10 U$13.5 U$13.10
+3V3C: 3V3C.TP C42.2 C96.1 C97.1 C117.1 C118.1 C119.1 C129.1 C130.1 C142.1 C179.2 C180.2 C181.2 C182.2 C183.2 C184.2 C189.1 IC1.14 IC2.14 L7.2 R8.2 R32.2 R42.1 R47.2 R48.2 R71.1 R72.2 R73.2 R75.2 R77.2 R78.2 R79.2 R166.1 U9.1 U9.3 U9.9 U9.14 U9.27 U9.43 U9.49 U11.10 U11.16 U12.10 U12.16 U13.10 U13.16 U$7.17 U$7.32 U$11.11 U$12.11 U$13.11 Y2.4 Y3.4
+5V: 5V.TP C2.2 C3.+ C46.1 C47.2 C48.+ C53.2 C54.+ C126.2 C128.+ L1.2 P1.26 R19.2 R20.2 U2.20 U4.2 U4.3 U6.6 U7.3 U8.3
A-A2: U1.114 U3.23
A-A3: U1.112 U3.24
A-A4: U1.110 U3.25
A-A5: U1.107 U3.26
A-A6: U1.105 U3.29
A-A7: U1.103 U3.30
A-A8: U1.101 U3.31
A-A9: U1.99 U3.32
A-A10: U1.97 U3.33
A-A11: U1.95 U3.34
A-A13: U1.89 U3.35
A-A14: U1.87 U3.36
A-A16: U1.65 U3.20
A-A17: U1.63 U3.21
A-D0: U1.38 U3.2
A-D1: U1.35 U3.4
A-D2: U1.33 U3.5
A-D3: U1.31 U3.7
A-D4: U1.26 U3.8
A-D5: U1.24 U3.10
A-D6: U1.12 U3.11
A-D7: U1.10 U3.13
A-D8: U1.4 U3.42
A-D9: U1.2 U3.44
A-D10: U1.1 U3.45
A-D11: U1.144 U3.47
A-D12: U1.142 U3.48
A-D13: U1.140 U3.50
A-D14: U1.137 U3.51
A-D15: U1.135 U3.53
A-RESET: C1.1 JP1.6 R1.1 U1.23 U$1.2
A-SDA10: U1.136 U3.22
A-TCK: JP1.1 U1.129
A-TDI: JP1.9 U1.131
A-TDO: JP1.3 U1.130
A-TMS: JP1.5 U1.128
ABE0_: DSP1.P$151 U9.15
ABE1_: DSP1.P$150 U9.39
AD1939_RESET: DSP1.P$50 R165.1 U$7.14
AGND: C98.2 C99.1 C100.- C101.1 C102.- C103.1 C104.1 C105.2 C107.1 C108.1 C110.1 C111.2 C113.1 C114.1 C116.- C117.2 C118.2 C119.2 C120.2 C121.- C122.2 C123.- C129.2 C130.2 C133.2 C143.2 C144.2 C145.2 C146.2 C148.1 C149.1 C152.2 C153.1 C190.- IC1.7 IC2.7 IC3.4 IC6.3 IC6.4 IC6.5 IC25.3 IC25.4 IC25.5 J3.RN J3.S J3.TN J11.RN J11.S J11.TN J12.RN J12.S J12.TN J13.RN J13.S J13.TN J14.RN J14.S J14.TN L8.1 R81.2 R84.2 R89.2 R97.2 T-AGND.1 U11.8 U11.13 U12.8 U12.13 U13.8 U13.13 U$7.1 U$7.4 U$7.44 U$7.46 U$7.48 U$11.4 U$11.16 U$12.4 U$12.16 U$13.4 U$13.16
B-A1: DSP1.P$149 U9.23
B-A2: DSP1.P$148 U9.24
B-A3: DSP1.P$147 U9.25
B-A4: DSP1.P$146 U9.26
B-A5: DSP1.P$142 U9.29
B-A6: DSP1.P$141 U9.30
B-A7: DSP1.P$140 U9.31
B-A8: DSP1.P$139 U9.32
B-A9: DSP1.P$138 U9.33
B-A10: DSP1.P$137 U9.34
B-A12: DSP1.P$135 U9.35
B-A13: DSP1.P$127 U9.36
B-A18: DSP1.P$122 U9.20
B-A19: DSP1.P$121 U9.21
B-D0: DSP1.P$116 U9.2
B-D1: DSP1.P$115 U9.4
B-D2: DSP1.P$114 U9.5
B-D3: DSP1.P$113 U9.7
B-D4: DSP1.P$112 U9.8
B-D5: DSP1.P$110 U9.10
B-D6: DSP1.P$109 U9.11
B-D7: DSP1.P$108 U9.13
B-D8: DSP1.P$105 U9.42
B-D9: DSP1.P$104 U9.44
B-D10: DSP1.P$103 U9.45
B-D11: DSP1.P$102 U9.47
B-D12: DSP1.P$101 U9.48
B-D13: DSP1.P$100 U9.50
B-D14: DSP1.P$99 U9.51
B-D15: DSP1.P$98 U9.53
B-HWAIT: DSP1.P$49 R80.2 U1.39
B-MISO: DSP1.P$54 U1.53 U$7.31
B-MOSI: DSP1.P$55 U1.50 U$7.30
B-RESET: C95.1 DSP1.P$13 R32.1 U1.41 U$9.2
B-SCK: DSP1.P$53 U1.54 U$7.34
B-SPISEL4: DSP1.P$47 R166.2 U$7.35
B-SPISS: DSP1.P$51 R8.1 U1.48
BMODE0: BM0.2 DSP1.P$96 R73.1
BMODE1: BM1.2 DSP1.P$95 R72.1
BYP1: IC1.13 U11.15
BYP2: IC1.5 U11.1
BYP3: IC1.6 U11.2
BYP4: IC1.12 U11.3
CAS: U1.126 U3.17
CLKIN: DSP1.P$10 R74.1
CLKOUT: DSP1.P$169 R37.2
CS1: U1.46 U3.19
DAC-LDAC: DSP1.P$37 U$11.9 U$12.9 U$13.9
DAC-RESET: DSP1.P$38 U$11.15 U$12.15 U$13.15
DM: J8.2 R4.2
DP: J8.3 R5.2
DQM0: U1.120 U3.15
DQM1: U1.40 U3.39
DR0PRI: DSP1.P$74 U$7.27
DR0SEC: DSP1.P$73 U$7.26
DT0PRI: DSP1.P$68 U$7.20
DT0SEC: DSP1.P$67 U$7.19
DT1PRI: DSP1.P$59 U$11.14
DT1SEC: DSP1.P$58 U$12.14
EMU_: DSP1.P$83 R49.1
ENC0A: P1.7 U1.98
ENC0B: P1.8 U1.96
ENC1A: P1.5 U1.102
ENC1B: P1.6 U1.100
ENC2A: P1.3 U1.106
ENC2B: P1.4 U1.104
ENC3A: P1.1 U1.113
ENC3B: P1.2 U1.111
F1CV1: U$12.3
F1CV2: U$12.2
F1CV3: U$12.6
F1CV4: U$12.7
FD1: U13.15
FD2: U13.1
FD3: U13.2
FD4: U13.3
FTDI-CTS: U1.34 U2.3
FTDI-RTS: U1.32 U2.11
FTDI-RX: U1.25 U2.1
FTDI-TX: U1.27 U2.5
GND: BM0.1 BM1.1 C1.2 C2.1 C3.- C4.2 C5.2 C6.2 C7.2 C8.2 C9.2 C10.2 C11.2 C12.2 C13.2 C14.2 C15.2 C16.2 C17.2 C18.2 C19.2 C20.2 C21.2 C22.2 C23.2 C24.2 C25.2 C26.2 C27.2 C28.2 C29.2 C30.2 C31.2 C32.2 C33.2 C34.2 C35.2 C36.2 C37.2 C38.2 C39.2 C40.2 C41.2 C42.1 C43.1 C44.1 C46.2 C47.1 C48.- C49.- C50.1 C51.- C52.1 C53.1 C54.- C73.- C74.1 C75.- C76.- C77.- C78.- C79.1 C80.1 C81.1 C82.1 C83.1 C84.1 C85.1 C86.1 C87.1 C88.1 C89.1 C90.1 C91.1 C92.1 C93.1 C94.1 C95.2 C96.2 C97.2 C125.1 C126.1 C127.- C128.- C142.2 C179.1 C180.1 C181.1 C182.1 C183.1 C184.1 C185.- C186.- C189.2 D2.A D7.1 DSP1.P$1 DSP1.P$2 DSP1.P$3 DSP1.P$7 DSP1.P$8 DSP1.P$9 DSP1.P$14 DSP1.P$15 DSP1.P$17 DSP1.P$19 DSP1.P$30 DSP1.P$39 DSP1.P$40 DSP1.P$41 DSP1.P$42 DSP1.P$43 DSP1.P$44 DSP1.P$56 DSP1.P$70 DSP1.P$88 DSP1.P$89 DSP1.P$90 DSP1.P$91 DSP1.P$92 DSP1.P$97 DSP1.P$106 DSP1.P$117 DSP1.P$128 DSP1.P$129 DSP1.P$130 DSP1.P$131 DSP1.P$132 DSP1.P$133 DSP1.P$144 DSP1.P$155 DSP1.P$170 DSP1.P$174 DSP1.P$175 DSP1.P$176 GND0.1 GND.TP J1.1 J2.2 J8.4 J8.G1 J8.G2 J8.G3 J8.G4 J9.GND J10._1 JP1.2 JP1.10 JP8.1 JP8.4 JP8.7 JP8.9 JP8.11 JP8.13 L8.2 P1.27 P1.28 R2.2 R22.2 R23.1 R27.2 R64.2 R70.2 R80.1 R165.2 U1.8 U1.18 U1.28 U1.37 U1.52 U1.72 U1.73 U1.82 U1.83 U1.85 U1.86 U1.94 U1.109 U1.117 U1.132 U1.133 U2.7 U2.18 U2.21 U2.25 U3.6 U3.12 U3.28 U3.41 U3.46 U3.52 U3.54 U4.1 U6.4 U6.8 U7.1 U8.1 U9.6 U9.12 U9.28 U9.41 U9.46 U9.52 U9.54 U$1.1 U$6.3 U$6.6 U$6.GP U$7.16 U$7.23 U$7.24 U$7.25 U$7.33 U$9.1 Y2.2 Y3.2
IN1L: JP12.1 L3.2
IN1L+: C153.2 C154.2 R139.1 U$7.53
IN1L-: C152.1 C154.1 R135.1 U$7.54
IN1R+: U$7.55
IN1R-: U$7.56
IN2L+: U$7.57
IN2L-: U$7.58
IN2R+: U$7.59
IN2R-: U$7.60
KEY0: P1.12 U1.77
KEY1: P1.11 U1.78
KEY2: P1.10 U1.79
KEY3: P1.9 U1.80
MIXF1: U12.15
MIXF2: U12.1
MIXF3: U12.2
MIXF4: U12.3
MIXIN1: IC2.13 U11.4
MIXIN2: IC2.5 U11.5
MIXIN3: IC2.6 U11.6
MIXIN4: IC2.12 U11.7
MIXSH1: U12.4
MIXSH2: U12.5
MIXSH3: U12.6
MIXSH4: U12.7
MMC-DETECT: R13.1 U1.88 U$6.CD
MMC-PROTECT: R14.1 U1.90 U$6.WP
MODE-KEY: P1.13 U1.76
MODE-LED: P1.14 U1.75
N$1: C43.2 C44.2 D1.C R63.2 U6.2
N$3: D1.A J2.1
N$4: C32.1 U1.124 Y1.2
N$5: C33.1 U1.125 Y1.1
N$6: R15.1 R22.1 U2.19
N$7: C45.1 D2.C L1.1 U6.1
N$9: C45.2 U6.3
N$12: J9.DM U2.16
N$13: J9.DP U2.15
N$14: C52.2 U2.17
N$15: LED2.C R23.2
N$16: C73.+ R25.2 R26.2 R42.2 U8.2 U8.4
N$17: J9.VCC R15.2
N$18: C74.2 C185.+ C186.+ R26.1 U$8.1 U$8.2 U$8.3
N$19: D7.3 L2.1 U$8.5 U$8.6 U$8.7 U$8.8
N$22: C75.+ L2.2 R24.2
N$24: R37.1 U9.38
N$25: R48.1 Y2.1
N$26: JP8.2 R49.2
N$28: JP8.5 R71.2
N$29: DSP1.P$163 R78.1
N$31: JP8.14 R50.2
N$32: C49.+ R16.2 R17.2 R18.2 U7.2 U7.4
N$35: DSP1.P$162 R79.1
N$36: R75.1 Y3.1
N$37: R3.1 R163.1 U3.38
N$38: R74.2 Y2.3
N$44: R4.1 U1.70
N$45: R5.1 U1.71
N$55: J10.2 R63.1 R64.1
N$56: J10.0 R162.1 U6.7
N$57: R76.2 Y3.3
N$59: R76.1 U$7.2
N$60: DSP1.P$27 LED3.C
N$61: C101.2 C102.+ U$7.47
N$62: C99.2 C100.+ U$7.52
N$63: C187.2 C188.2 U$7.61
N$64: DSP1.P$28 LED4.C
N$65: C187.1 R164.1
N$66: LED3.A R77.1
N$67: LED4.A R47.1
N$68: C104.2 R82.1 R85.2 R86.2
N$69: C105.1 R81.1 R83.1 R88.1
N$70: C107.2 IC3.3 R88.2
N$71: C106.2 IC3.1 R86.1 R87.1
N$72: C108.2 C109.+ R87.2
N$73: C110.2 R90.1 R93.2 R94.2
N$74: C106.1 IC3.2 R85.1
N$75: C111.1 R84.1 R91.1 R96.1
N$76: C113.2 IC3.5 R96.2
N$77: C112.2 IC3.7 R94.1 R95.1
N$78: C114.2 C115.+ R95.2
N$79: C112.1 IC3.6 R93.1
N$80: C131.2 IC25.1 R98.1 R102.2
N$81: C124.+ R139.2
N$82: C147.+ R135.2
N$83: U11.14 U$11.8
N$84: J13.T JP7.1
N$85: J12.T JP6.1
N$86: J11.T JP5.1
N$87: J3.T JP3.1
N$88: J14.T JP9.1
N$89: C132.1 IC25.6 R99.2 R102.1
N$90: IC2.1 JP16.1
N$91: IC2.4 JP16.2
N$92: IC2.8 JP16.3
N$93: IC2.11 JP16.4
N$94: IC1.1 JP14.1
N$95: IC1.4 JP14.2
N$96: IC1.8 JP14.3
N$97: IC1.11 JP14.4
N$98: IC1.3 JP13.2
N$99: IC1.9 JP13.3
N$100: IC1.10 JP13.4
N$101: IC1.2 JP13.1
N$102: IC2.3 JP15.2
N$103: IC2.9 JP15.3
N$104: C147.- C150.1 IC6.1 R134.1 R137.2
N$105: C124.- C151.1 IC6.7 R136.1
N$106: C148.2 L3.1 R133.2
N$107: IC2.10 JP15.4
N$108: C150.2 IC6.2 R133.1 R134.2
N$109: IC2.2 JP15.1
N$110: C151.2 IC6.6 R136.2 R137.1
N$111: C132.2 IC25.7 R99.1 R100.2
N$112: C134.+ R100.1
N$113: C134.- JP17.1
N$114: JP18.1 R92.2
N$115: JP19.1 R101.2
N$121: U12.9 U13.14
N$122: U11.9 U12.14
N$123: U$12.8 U$13.14
N$128: JP2.1 U1.22
OLED-DC: P1.15 U1.47
OLED-RES: P1.16 U1.43
OUT1L: C115.- JP11.1 R97.1
OUT1L+: R91.2 U$7.36
OUT1L-: R90.2 U$7.37
OUT1R: C109.- JP10.1 R89.1
OUT1R+: R83.2 U$7.38
OUT1R-: R82.2 U$7.39
OUT2L+: U$7.40
OUT2L-: U$7.41
OUT2R+: U$7.42
OUT2R-: U$7.43
POWER_CON: R162.2 U1.44
POWER_SW: J10._0 U1.42
RAS: U1.121 U3.18
RFS0: DSP1.P$75 R168.1 U$7.29
RSCLK0: DSP1.P$76 R167.1 U$7.28
S1: C131.1 IC25.2 R92.1 R98.2 R101.1
SA10: DSP1.P$164 U9.22
SCAS_: DSP1.P$166 U9.17
SCKE: DSP1.P$173 U9.37
SCL: J1.3 R66.2 U1.123
SDA: J1.2 R65.2 U1.122
SDCK: R163.2 U1.115
SDCKE: R2.1 U1.119 U3.37
SDWE: U1.127 U3.16
SH1CV1: U$13.3
SH1CV2: U$13.2
SH1CV3: U$13.6
SH1CV4: U$13.7
SHD1: U13.4
SHD2: U13.5
SHD3: U13.6
SHD4: U13.7
SMS_: DSP1.P$172 U9.19
SPI1-CS0: P1.17 U1.56
SPI1-CS1: P1.18 U1.62
SPI1-CS2: R9.1 U1.64 U$6.1
SPI1-MISO: P1.20 R11.1 U1.60 U$6.7
SPI1-MOSI: P1.21 R10.1 U1.58 U$6.2
SPI1-SCK: P1.19 R12.1 U1.57 U$6.5
SRAS_: DSP1.P$167 U9.18
SWE_: DSP1.P$165 U9.16
TCK: DSP1.P$94 JP8.8
TDI: DSP1.P$86 JP8.12
TDO: DSP1.P$87 R50.1
TFS0: DSP1.P$69 R168.2 U$7.22
TFS1: DSP1.P$60 U11.12 U12.12 U13.12 U$11.13 U$12.13 U$13.13
TMS: DSP1.P$85 JP8.6
TRST_: DSP1.P$84 JP8.10 R70.1
TSCLK0: DSP1.P$72 R167.2 U$7.21
TSCLK1: DSP1.P$61 U11.11 U12.11 U13.11 U$11.12 U$12.12 U$13.12
USB-OC: R19.1 U1.66 U4.5
USB-VBOF: R20.1 U1.74 U4.4
VBUS: C50.2 C51.+ J8.1 U1.68 U4.6 U4.7 U4.8
VCACV1: U$11.3
VCACV2: U$11.2
VCACV3: U$11.6
VCACV4: U$11.7
VDDCORE: C23.1 C24.1 C25.1 C26.1 C27.1 C28.1 C29.1 C30.1 C31.1 C40.1 R6.2 U1.29 U1.51 U1.55 U1.138
VDDEXT: C76.+ C77.+ C78.+ C79.2 C80.2 C81.2 C82.2 C83.2 C84.2 C85.2 C86.2 C87.2 C88.2 DSP1.P$6 DSP1.P$12 DSP1.P$18 DSP1.P$20 DSP1.P$31 DSP1.P$45 DSP1.P$57 DSP1.P$71 DSP1.P$93 DSP1.P$107 DSP1.P$118 DSP1.P$134 DSP1.P$145 DSP1.P$156 DSP1.P$171 R25.1 R27.1
VDDIN: C15.1 C16.1 C17.1 R17.1 U1.17
VDDINT: C89.2 C90.2 C91.2 C92.2 C93.2 C94.2 DSP1.P$25 DSP1.P$52 DSP1.P$66 DSP1.P$80 DSP1.P$111 DSP1.P$143 DSP1.P$157 DSP1.P$168 R24.1
VDDIO: C4.1 C5.1 C6.1 C7.1 C8.1 C9.1 C10.1 C11.1 C12.1 C13.1 C14.1 R16.1 U1.7 U1.36 U1.69 U1.81 U1.92 U1.93 U1.108 U1.116
VDDOUT: C18.1 C19.1 R6.1 R7.1 U1.16 VDDOUT.TP
VDDSYS: C20.1 C21.1 C22.1 R7.2 U1.84
VROUT: DSP1.P$4 DSP1.P$5 U$8.4

## Tracks (layer width: path | path; a pad name or v marks a point on that pad's centre or on a via)
+3V3  (via drill 0.38, 0.6, 0.7)
  Top 0.152: C41.1 R1.2 130.3,6.22 130.81,5.71 133.35,5.71 133.99,6.35 v133.99,8.89 | 133.99,9.04 LED2.A | U$6.4 149.42,29.4 v149.86,29.84
  Top 0.254: U2.4 129.28,86.62 132.72,83.19 v132.72,81.28 | 3V3.TP v116.2,78.11
  Top 0.406: v133.99,8.89 133.99,9.04
  Top 0.61: v133.99,77.47 R18.1
  Bottom 0.152: R3.2 149.86,56.52 v149.86,57.78 | R14.2 R13.2 R11.2 R12.2 149.86,31.24 | 149.86,31.24 R10.2 R9.2 | 149.86,31.24 v149.86,29.84
  Bottom 0.203: U3.27 165.02,48.02 165.42,47.62 | 165.42,47.62 C39.1 C37.1 | 165.42,47.62 v164.78,46.99 | 165.42,67.22 166.15,67.22 C36.1 C34.1 | U3.3 165.42,67.22 | U3.1 165.18,68.82 165.42,68.58 165.42,67.22 | 165.42,67.22 165.42,66.36 v165.74,66.04 | U3.9 165.23,62.42 165.42,62.23 | 165.42,62.23 165.42,61.28 v165.74,60.96 165.74,59.05 165.1,58.42 U3.14 | 165.42,62.23 C35.1 | U3.49 151.81,64.82 v151.76,64.77 | C38.1 U3.43 | C38.1 | C38.1 151.27,60.78 v151.76,61.28 | v124.46,78.11 R65.1 R66.1
  Bottom 0.406: P1.25 164.59,12.19 C125.2 161.8,12.19 161.29,12.7 C127.+
  pour Route2 (isolate 0.305): 137.16,77.47 137.16,80.01 135.89,81.28 115.57,81.28 114.3,80.01 116.84,77.47 116.84,0 172.72,0 172.72,111.76 158.75,111.76 158.75,74.93 157.48,73.66 149.86,73.66 149.86,45.72 147.32,43.18 125.73,43.18 121.92,46.99 121.92,68.58 125.73,72.39 132.08,72.39
+3V3A  (via drill 0.38)
  Top 0.254: U$7.51 58.02,49.3 v58.42,48.9 | U$7.45 60.58,51.05 v60.33,50.8 | U$7.5 61.23,40.27 v61.59,40.64 | U$7.62 58.02,42.15 v58.42,42.55 | U$12.5 v66.98,13.01 v66.99,13.02 | U$12.10 65.69,7.02 65.09,7.62 v64.14,7.62 | v59.37,13.02 59.37,11.7 U$13.5 | U$13.10 58.06,7.02 57.47,7.62 v56.52,7.62 | U$11.5 v51.11,13.01 v51.12,13.02 | U$11.10 49.81,7.02 49.21,7.62 v48.26,7.62 | IC3.8 36.2,80.64 v34.92,79.38 | C188.1 v52.39,38.42 52.39,37.66 R164.2 | IC6.8 60.45,77.47 C149.2 v60.33,76.2 | C133.1 25.53,41.91 IC25.8 v22.23,41.91
  Top 0.406: L7.1 v94.61,88.27 94.3,87.95 C190.+
  Bottom 0.254: C146.1 58.29,49.02 v58.42,48.9 | C145.1 60.52,50.99 v60.33,50.8 | C143.1 61.4,40.45 v61.59,40.64 | C144.1 58.29,42.42 v58.42,42.55 | 66.99,10.6 v66.99,13.02 | C120.1 66.99,10.6 | C121.+ 67.44,10.16 66.99,10.6 | C122.1 58.55,9.65 59.37,10.48 | 59.37,10.48 v59.37,13.02 | C123.+ 59.69,10.16 59.37,10.48 | 51.12,10.6 v51.12,13.02 | C98.1 51.12,10.6 | C116.+ 51.56,10.16 51.12,10.6 | v34.92,79.38 34.92,80.52 C103.2
  pour Route2: 0,111.76 99.06,111.76 99.06,74.93 64.77,74.93 64.77,26.67 72.39,19.05 72.39,0 0,0
+3V3C  (via drill 0.38, 0.6)
  Top 0.152: v86.36,56.83 84.14,59.05 83.19,59.05 81.92,60.33 81.92,67.31 81.28,67.94 v80.64,67.94 | Y3.4 v70.48,38.42 | R71.1 v84.45,12.7 | R32.2 v105.41,8.89 | v83.19,73.03 84.45,74.3 87.63,74.3 90.17,76.83 90.17,81.6 90.61,82.04 R47.2 R77.2 | v88.9,52.39 v101.6,52.39 | U$11.11 50.46,5.1 50.48,5.08 50.48,1.27 | U$13.11 58.72,5.1 58.74,5.08 58.74,1.27 | U$12.11 66.33,5.1 66.36,5.08 66.36,1.27
  Top 0.254: U9.49 97.74,27.36 v98.42,26.67 | U9.43 102.54,26.68 v102.55,26.67 | U9.9 100.14,15.43 v100.65,14.92 | U9.14 104.14,15.56 v104.78,14.92 | U9.27 114.54,15.63 v115.25,14.92 | U9.1 93.74,16.11 94.3,15.56 95.57,15.56 | v95.57,14.92 95.57,15.56 | U9.3 95.34,16.29 C179.2 95.57,15.56 | v80.64,67.94 Y2.4 | v113.03,74.3 3V3C.TP | U$7.17 68.06,40.84 v67.63,41.27 | U$7.32 69.33,50.59 68.9,50.16 v66.67,50.16 | R166.1 v70.48,55.88 | U13.16 v23.5,4.45 23.5,1.27 | 27.3,4.45 U12.10 27.3,1.27 | U12.16 v34.92,4.45 34.92,1.27 | 38.73,4.45 U11.10 38.73,1.27 | U11.16 v46.35,4.45 46.35,1.27 | 15.88,1.27 23.5,1.27 | 23.5,1.27 27.3,1.27 | 27.3,1.27 34.92,1.27 | 34.92,1.27 38.73,1.27 | 38.73,1.27 46.35,1.27 | 46.35,1.27 50.48,1.27 58.74,1.27 66.36,1.27 v74.3,1.27 | 15.88,1.27 U13.10 | IC1.14 v33.02,29.84 31.11,27.94 29.84,27.94 25.4,32.38 15.24,32.38 12.06,29.21 12.06,27.94 | IC2.14 v16.51,29.84 14.61,27.94 12.06,27.94 | 12.06,27.94 12.06,5.08 15.88,1.27
  Top 0.406: v111.12,77.47 R42.1 109.22,77.6 109.22,79.38 107.95,80.64 107.95,85.72 105.41,88.27 L7.2
  Bottom 0.152: R8.2 v86.36,56.83 88.9,54.29 v88.9,52.39 | v70.48,38.42 71.12,39.05 R75.2 73.79,37.53 C97.1 | R79.2 R78.2 v101.6,52.39 | R72.2 R73.2 88.46,30.35 v88.9,30.8
  Bottom 0.254: C182.2 v98.42,26.67 | C181.2 v102.55,26.67 | C183.2 100.01,15.56 v100.65,14.92 | C180.2 104.14,15.56 v104.78,14.92 | C184.2 114.62,15.56 v115.25,14.92 | v95.57,14.92 C179.2 C42.2 | v80.64,67.94 80.64,65.41 80.01,64.77 R48.2 C96.1 | v67.63,41.27 66.8,41.27 C189.1 | C142.1 v66.67,50.16 | C119.1 22.99,4.95 v23.5,4.45 | C118.1 34.42,4.95 v34.92,4.45 | C117.1 45.85,4.95 v46.35,4.45 | v33.02,29.84 33.02,30.61 C129.1 | v16.51,29.84 16.51,30.61 C130.1
  pour Route2: 111.76,78.74 113.03,78.74 115.57,76.2 115.57,0 73.66,0 73.66,20.32 66.04,27.94 66.04,73.66 77.47,73.66 77.47,33.02 78.74,31.75 109.22,31.75 110.49,33.02 110.49,63.5 109.22,64.77 78.74,64.77 78.74,73.66 106.68,73.66
+5V  (via drill 0.38, 0.6, 0.7)
  Top 0.254: U2.20 121.58,89.88 v121.92,89.53 | R19.2 110.62,95.38 v111.76,96.52 112.9,95.38 R20.2 | U4.3 115.57,92.08 v116.2,91.44 115.57,90.81 U4.2 | 5V.TP v114.94,85.09
  Top 0.406: C2.2 v100.65,82.55 | U8.3 102.16,82.47 C2.2 | C2.2 C3.+
  Top 0.61: U7.3 134.21,90.58 133.35,91.44 C47.2 | C47.2 C48.+ | 151.13,82.55 U6.6 | 151.13,82.55 v154.94,82.55 160.71,88.32 L1.2 162.62,88.27 163.19,88.27 167,84.45 167,71.12 171.45,66.67 171.45,16.51 P1.26 | 151.13,82.55 150.5,81.92 150.5,80.14 C46.1 | C47.2 v133.35,97.79
  Bottom 0.254: v121.92,89.53 122.43,89.03 C53.2 122.43,87.5 121.92,87 C54.+
  Bottom 0.406: C128.+ 161.29,6.35 161.8,5.84 C126.2 164.59,5.84 167.64,8.89 167.64,12.7 P1.26
  pour Route2 (isolate 0.305): 156.21,74.93 146.05,74.93 138.43,82.55 113.03,82.55 105.41,74.93 100.33,74.93 100.33,111.76 157.48,111.76 157.48,76.2
A-A2  (via drill 0.38)
  Top 0.152: v162.56,51.44 161.93,50.8 150.81,50.8 149.44,52.17 U1.114
  Bottom 0.152: v162.56,51.44 162.78,51.22 U3.23
A-A3  (via drill 0.38)
  Top 0.152: U1.112 148.54,51.17 149.86,49.85 161.93,49.85 v162.56,50.48
  Bottom 0.152: v162.56,50.48 164.14,50.48 U3.24
A-A4  (via drill 0.38)
  Top 0.152: U1.110 147.31,50.17 148.59,48.9 161.93,48.9 v162.56,49.53
  Bottom 0.152: v162.56,49.53 162.65,49.62 U3.25
A-A5  (via drill 0.38)
  Top 0.152: U1.107 144.14,46.99 144.46,46.67 145.1,46.67 147,48.58 v162.56,48.58
  Bottom 0.152: v162.56,48.58 162.8,48.82 U3.26
A-A6  (via drill 0.38)
  Top 0.152: U1.105 143.14,47.04 143.83,46.35 145.41,46.35 147.32,48.26 151.13,48.26 v151.45,47.94
  Bottom 0.152: U3.29 152.32,48.82 v151.45,47.94
A-A7  (via drill 0.38)
  Top 0.152: v150.18,47.62 149.86,47.94 147.64,47.94 145.73,46.04 142.88,46.04 142.14,46.77 U1.103
  Bottom 0.152: U3.30 152.17,49.62 v150.18,47.62
A-A8  (via drill 0.38)
  Top 0.152: v148.91,47.31 148.59,47.62 147.96,47.62 146.05,45.72 142.24,45.72 141.14,46.82 U1.101
  Bottom 0.152: U3.31 152.02,50.42 v148.91,47.31
A-A9  (via drill 0.38)
  Top 0.152: v147.96,46.67 147.64,46.67 146.37,45.4 141.6,45.4 140.14,46.87 U1.99
  Bottom 0.152: U3.32 151.87,51.22 147.96,47.31 v147.96,46.67
A-A10  (via drill 0.38)
  Top 0.152: v147.32,45.4 147,45.09 140.97,45.09 139.14,46.91 U1.97
  Bottom 0.152: U3.33 152.03,52.02 147.32,47.31 v147.32,45.4
A-A11  (via drill 0.38)
  Top 0.152: U1.95 138.14,46.96 140.34,44.77 146.05,44.77 v146.37,44.45
  Bottom 0.152: U3.34 152.2,52.82 146.37,46.99 v146.37,44.45
A-A13  (via drill 0.38)
  Top 0.152: v154.94,46.67 149.54,46.67 146.69,43.81 140.34,43.81 137.79,46.35 135.57,46.35 135.14,46.79 U1.89
  Bottom 0.152: U3.35 154.66,53.62 155.89,52.39 155.89,47.62 v154.94,46.67
A-A14  (via drill 0.38)
  Top 0.152: U1.87 134.14,46.99 136.84,44.29 v138.75,44.29 | v141.6,42.55 149.22,42.55 152.08,45.4 156.21,45.4 v157,46.2
  Bottom 0.152: v138.75,44.29 139.86,44.29 v141.6,42.55 | v157,46.2 157,51.75 154.34,54.42 U3.36
A-A16  (via drill 0.38)
  Top 0.152: v160.34,46.99 156.84,46.99 155.57,45.72 151.13,45.72 148.59,43.18 127.64,43.18 125.09,45.72 125.09,47.94 127.64,50.48 127.64,52.7 127.17,53.17 U1.65
  Bottom 0.152: U3.20 163.16,53.62 161.61,52.07 161.61,48.26 v160.34,46.99
A-A17  (via drill 0.38)
  Top 0.152: v161.93,47.62 156.84,47.62 155.26,46.04 150.18,46.04 147.64,43.5 127.95,43.5 125.73,45.72 125.73,47.94 127.95,50.16 127.95,53.66 127.44,54.17 U1.63
  Bottom 0.152: U3.21 162.99,52.82 161.93,51.75 v161.93,47.62
A-D0  (via drill 0.38)
  Top 0.152: v162.56,67.94 156.84,73.66 128.59,73.66 125.73,70.8 125.73,70.17 126.36,69.53 126.36,66.99 126.04,66.67 U1.38
  Bottom 0.152: U3.2 162.8,68.02 v162.56,67.94
A-D1  (via drill 0.38)
  Top 0.152: U1.35 127.64,71.12 129.86,73.34 156.21,73.34 v162.56,66.99
  Bottom 0.152: U3.4 163.13,66.42 v162.56,66.99
A-D2  (via drill 0.38)
  Top 0.152: U1.33 128.64,70.22 131.44,73.03 155.57,73.03 v162.56,66.04
  Bottom 0.152: U3.5 162.98,65.62 v162.56,66.04
A-D3  (via drill 0.38)
  Top 0.152: U1.31 129.64,70.58 131.76,72.71 154.62,72.71 v162.56,64.77
  Bottom 0.152: U3.7 163.31,64.02 v162.56,64.77
A-D4  (via drill 0.38)
  Top 0.152: U1.26 132.14,70.55 133.99,72.39 153.99,72.39 v162.56,63.82
  Bottom 0.152: U3.8 163.16,63.22 v162.56,63.82
A-D5  (via drill 0.38)
  Top 0.152: U1.24 133.14,70.91 134.3,72.07 153.35,72.07 v162.56,62.87
  Bottom 0.152: U3.10 163.17,61.62 162.56,62.23 v162.56,62.87
A-D6  (via drill 0.38)
  Top 0.152: U1.12 139.14,70.56 140.34,71.75 152.72,71.75 162.56,61.91 v162.56,61.28
  Bottom 0.152: U3.11 163.02,60.82 v162.56,61.28
A-D7  (via drill 0.38)
  Top 0.152: U1.10 140.14,70.92 140.65,71.44 152.4,71.44 161.61,62.23 v161.61,60.01
  Bottom 0.152: U3.13 162.4,59.22 v161.61,60.01
A-D8  (via drill 0.38)
  Top 0.152: v156.84,60.96 156.84,66.36 152.08,71.12 144.15,71.12 143.14,70.11 U1.4
  Bottom 0.152: U3.42 154.47,59.22 154.94,59.69 155.57,59.69 v156.84,60.96
A-D9  (via drill 0.38)
  Top 0.152: U1.2 144.14,69.84 145.1,70.8 151.76,70.8 156.21,66.36 156.21,61.28 v155.89,60.96
  Bottom 0.152: v155.89,60.96 155.75,60.82 U3.44
A-D10  (via drill 0.38)
  Top 0.152: U1.1 144.64,69.71 145.41,70.48 151.45,70.48 155.89,66.04 155.89,62.55 v154.94,61.59
  Bottom 0.152: v154.94,61.59 153.32,61.59 U3.45
A-D11  (via drill 0.38)
  Top 0.152: 149.54,66.99 v149.86,66.67 149.37,67.17 U1.144
  Bottom 0.152: U3.47 151.76,63.18 151.17,62.59 150.46,62.59 149.86,63.18 v149.86,66.67
A-D12  (via drill 0.38)
  Top 0.152: v154.94,64.14 155.57,64.77 155.57,65.72 155.26,66.04 147.64,66.04 147.51,66.17 U1.142
  Bottom 0.152: U3.48 154.82,64.02 v154.94,64.14
A-D13  (via drill 0.38)
  Top 0.152: U1.140 147.4,65.17 147.64,65.41 v154.94,65.41
  Bottom 0.152: v154.94,65.41 154.72,65.62 U3.50
A-D14  (via drill 0.38)
  Top 0.152: v150.81,64.77 150.5,65.09 148.91,65.09 147.49,63.67 U1.137
  Bottom 0.152: U3.51 152.46,66.42 v150.81,64.77
A-D15  (via drill 0.38)
  Top 0.152: U1.135 150.3,62.67 v150.81,63.18
  Bottom 0.152: U3.53 152.47,68.02 150.18,65.72 150.18,63.82 v150.81,63.18
A-RESET  (via drill 0.38)
  Top 0.152: U1.23 133.64,67.34 v133.67,67.31 | v139.38,74.3 140.34,74.3 140.97,74.93 142.24,74.93 142.88,74.3 157.16,74.3 v159.38,72.07 | v159.38,44.45 148.59,33.66 133.99,33.66 v132.08,31.75 | U$1.2 128.3,7.78 128.3,10 C1.1 | R1.1 124.97,7.75 v124.46,8.26 121.28,8.26 JP1.6
  Top 0.406: R1.1 128.3,7.78
  Bottom 0.152: v133.67,67.31 134.3,67.94 136.53,67.94 139.38,70.8 v139.38,74.3 | v159.38,44.45 v159.38,72.07 | v132.08,31.75 131.44,31.11 131.44,17.78 124.46,10.79 v124.46,8.26
A-SDA10  (via drill 0.38)
  Top 0.152: U1.136 149.85,63.17 150.5,63.82 151.76,63.82 160.66,54.93 v165.74,54.93
  Bottom 0.152: v165.74,54.93 165.74,52.7 165.05,52.02 U3.22
A-TCK  (via drill 0.38)
  Top 0.152: U1.129 144.48,59.67 143.51,60.64 143.51,66.67 146.05,69.22 v147,69.22 | v156.84,43.18 147.96,34.29 133.35,34.29 v131.13,32.07
  Bottom 0.152: v147,69.22 148.27,70.48 156.53,70.48 158.75,68.26 158.75,43.81 158.12,43.18 v156.84,43.18 | v131.13,32.07 130.81,31.75 130.81,18.41 120.65,8.26 120.65,3.17 120.02,2.54 115.57,2.54 JP1.1
A-TDI  (via drill 0.38)
  Top 0.152: U1.131 144.75,60.67 144.15,61.28 144.15,66.04 146.05,67.94 v148.27,67.94 | v154.94,43.81 146.69,35.56 131.44,35.56 v129.22,33.34 | v120.65,10.79 119.38,10.79 115.57,6.99 115.57,3.17 116.2,2.54 123.19,2.54 JP1.9
  Bottom 0.152: v148.27,67.94 150.18,69.85 155.89,69.85 158.12,67.63 158.12,45.72 156.21,43.81 v154.94,43.81 | v129.22,33.34 129.22,32.07 129.54,31.75 129.54,19.68 v120.65,10.79
A-TDO  (via drill 0.38)